# Altium PCB opo_v4_bak.PcbDoc
Units mil, origin at the board's own origin, x right, y up, seen from the top; angles counter-clockwise.
Board outline 1250 x 1250 mil, 6 copper layers (Top Layer, GND, Mid-Layer 3, Mid-Layer 4, VCC, Bottom Layer), stack 72.01 mil thick; 106 components, 83 nets, 445 pads, 216 vias.
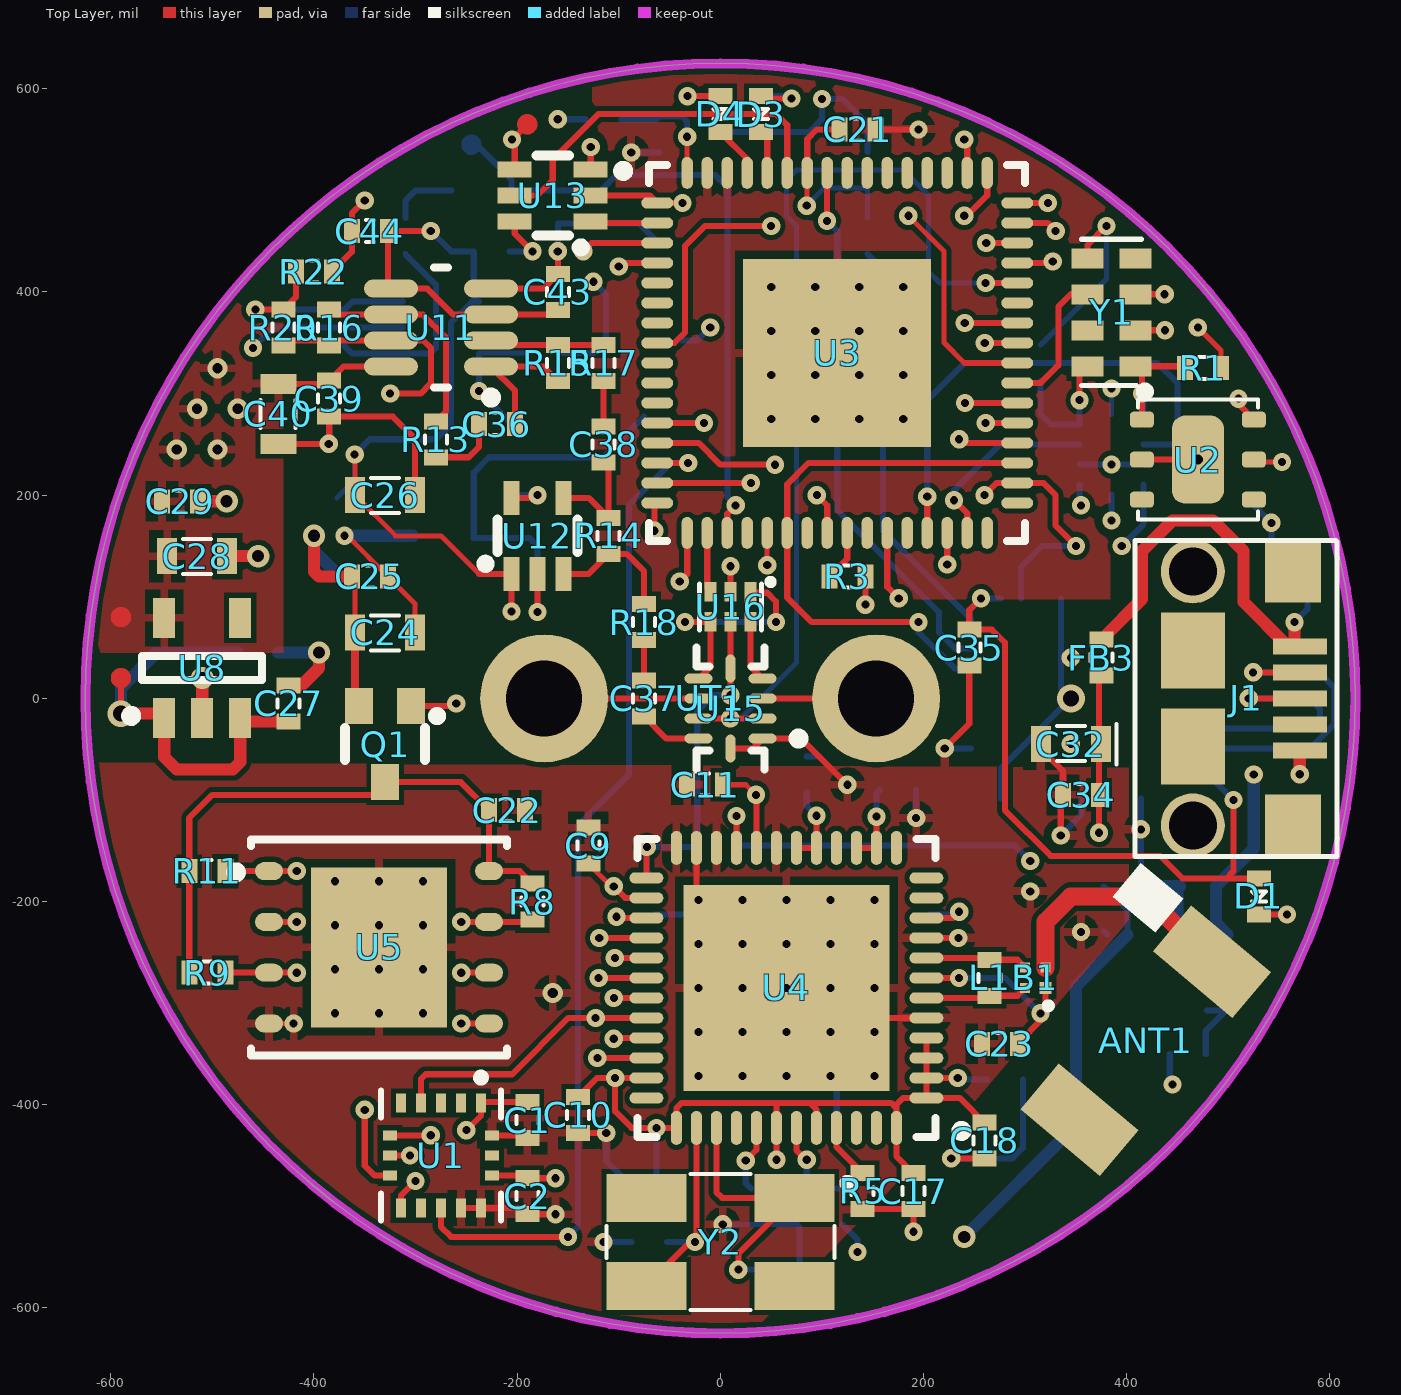
[diagram p0: Top Layer view]
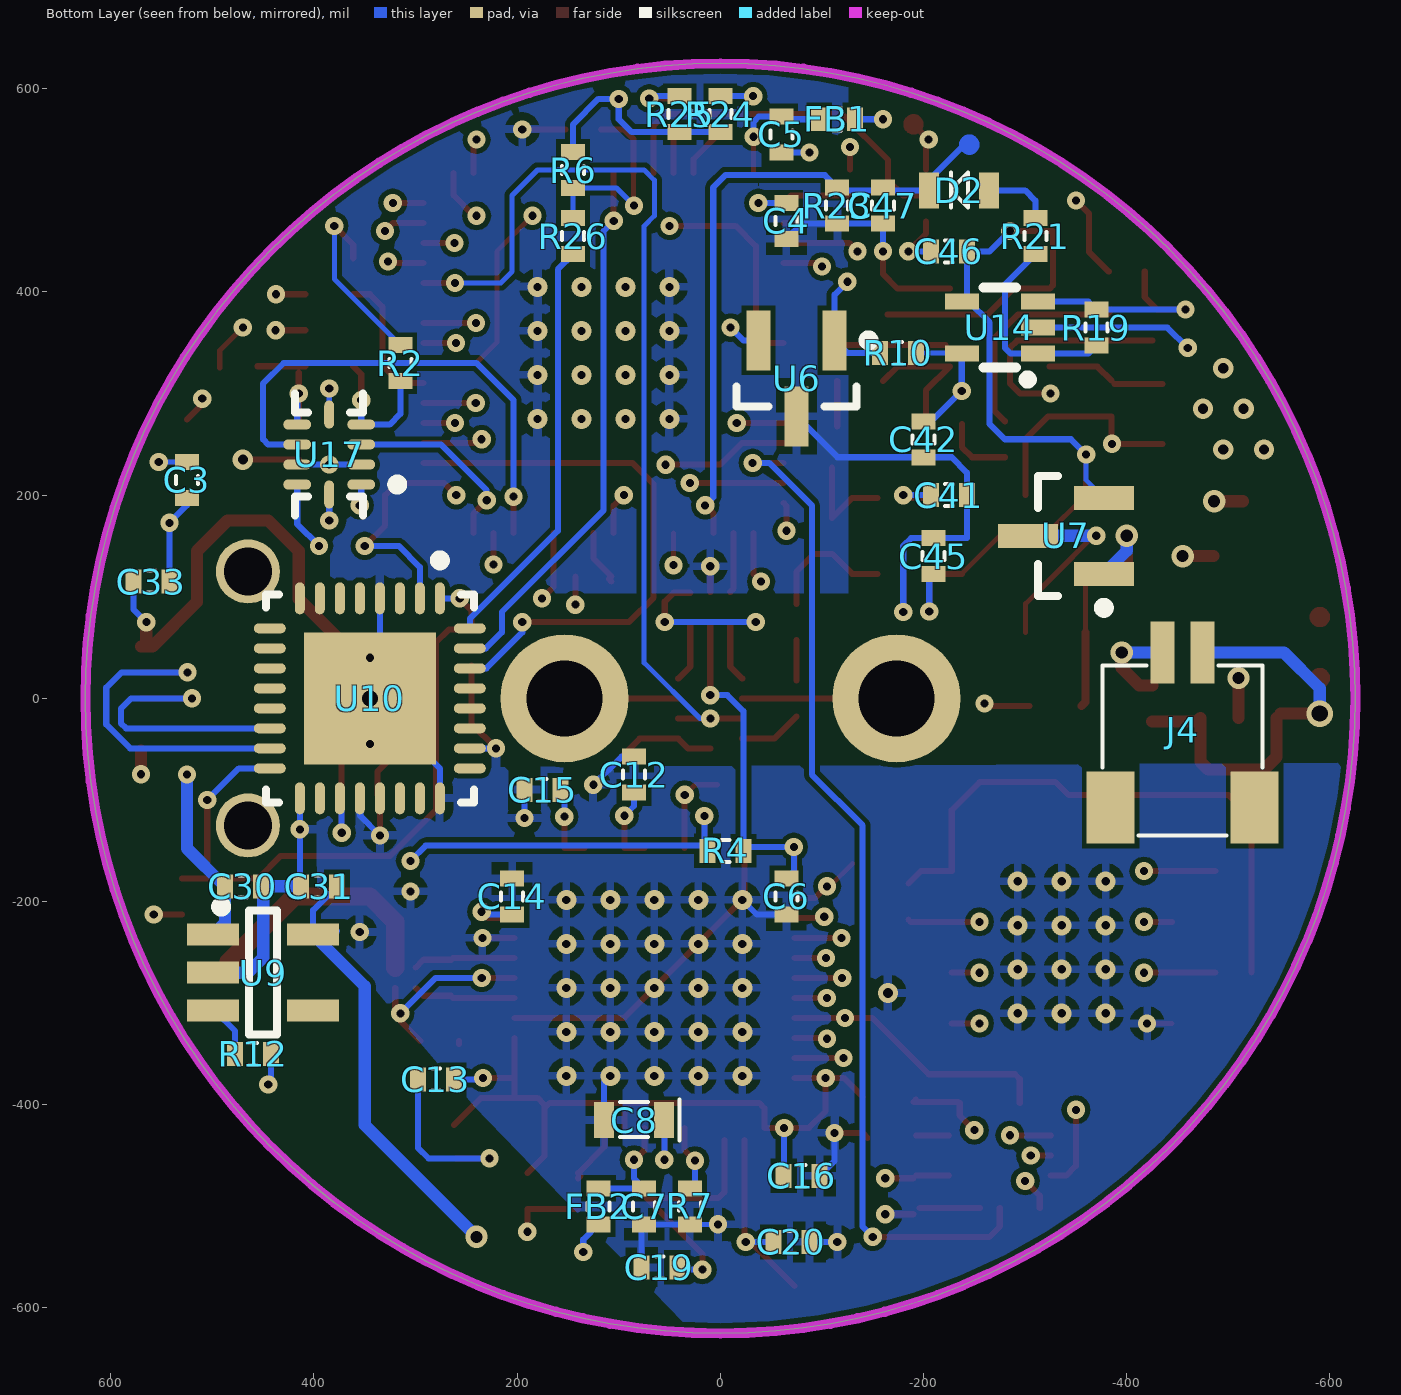
[diagram p1: Bottom Layer view, seen from below]
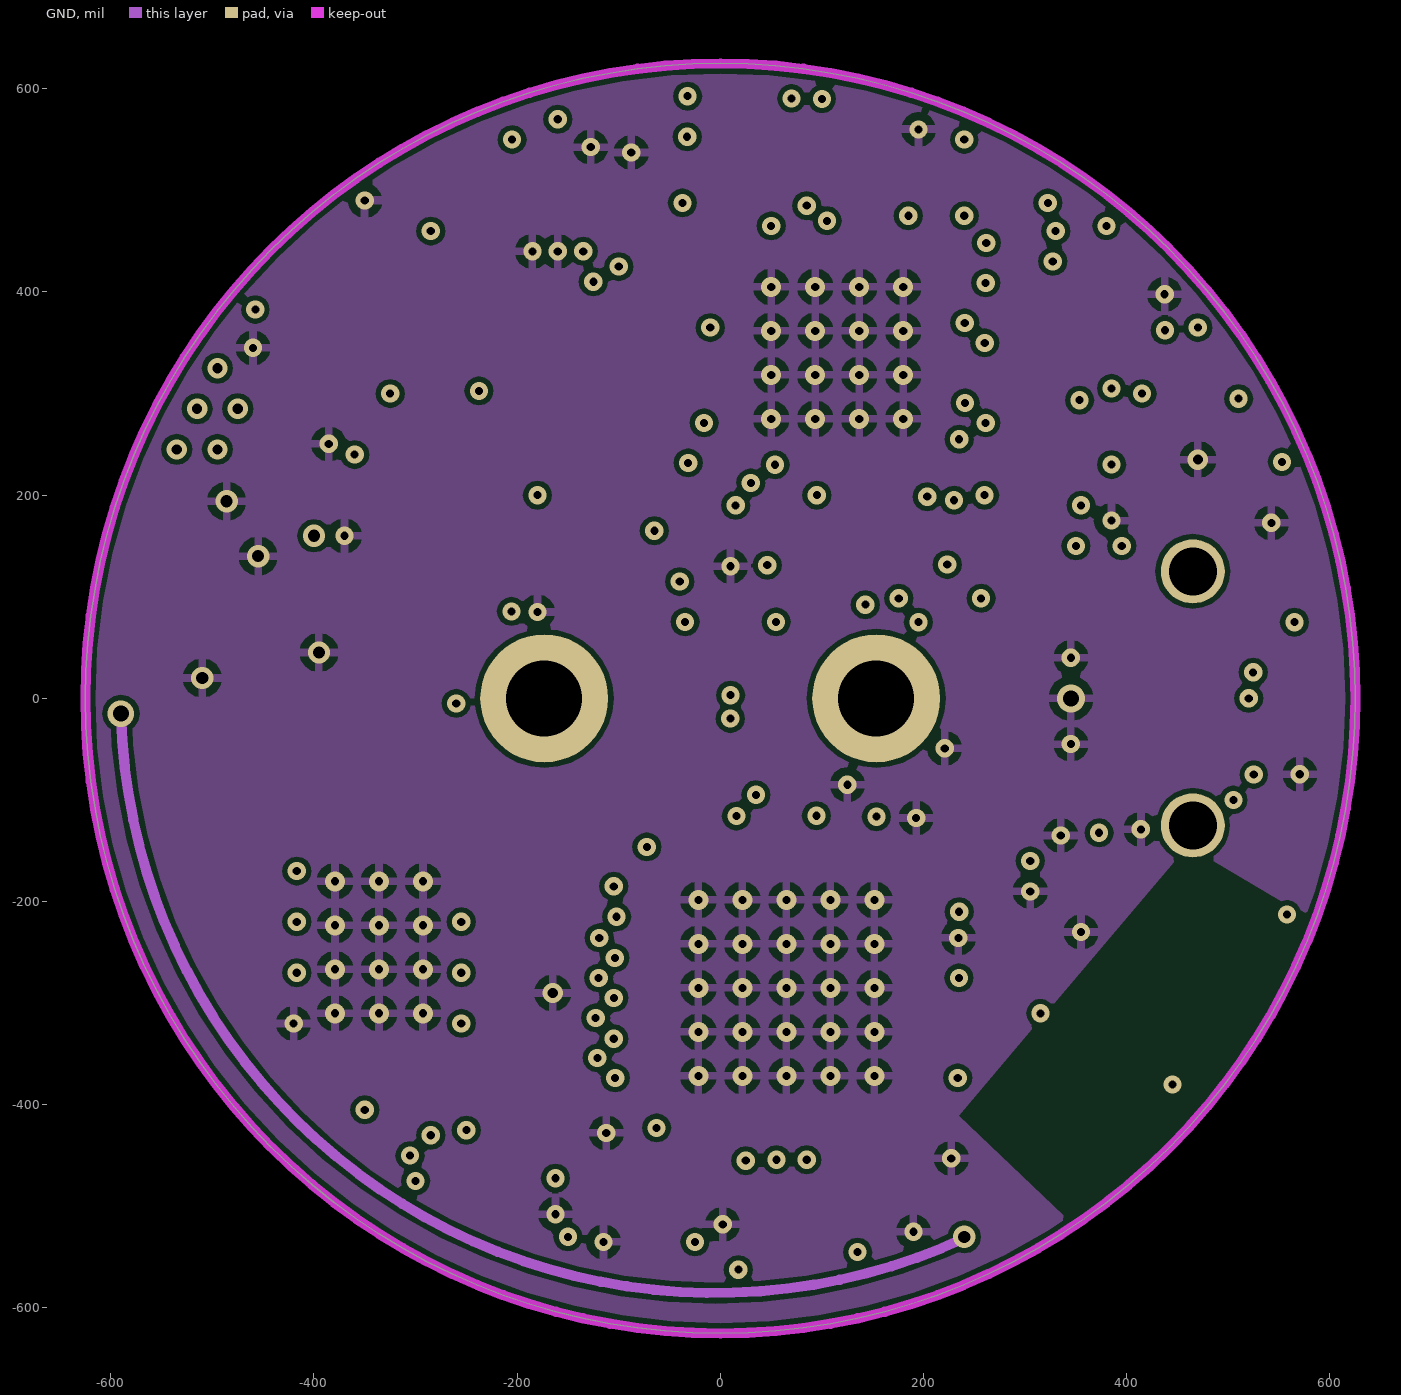
[diagram p2: GND]
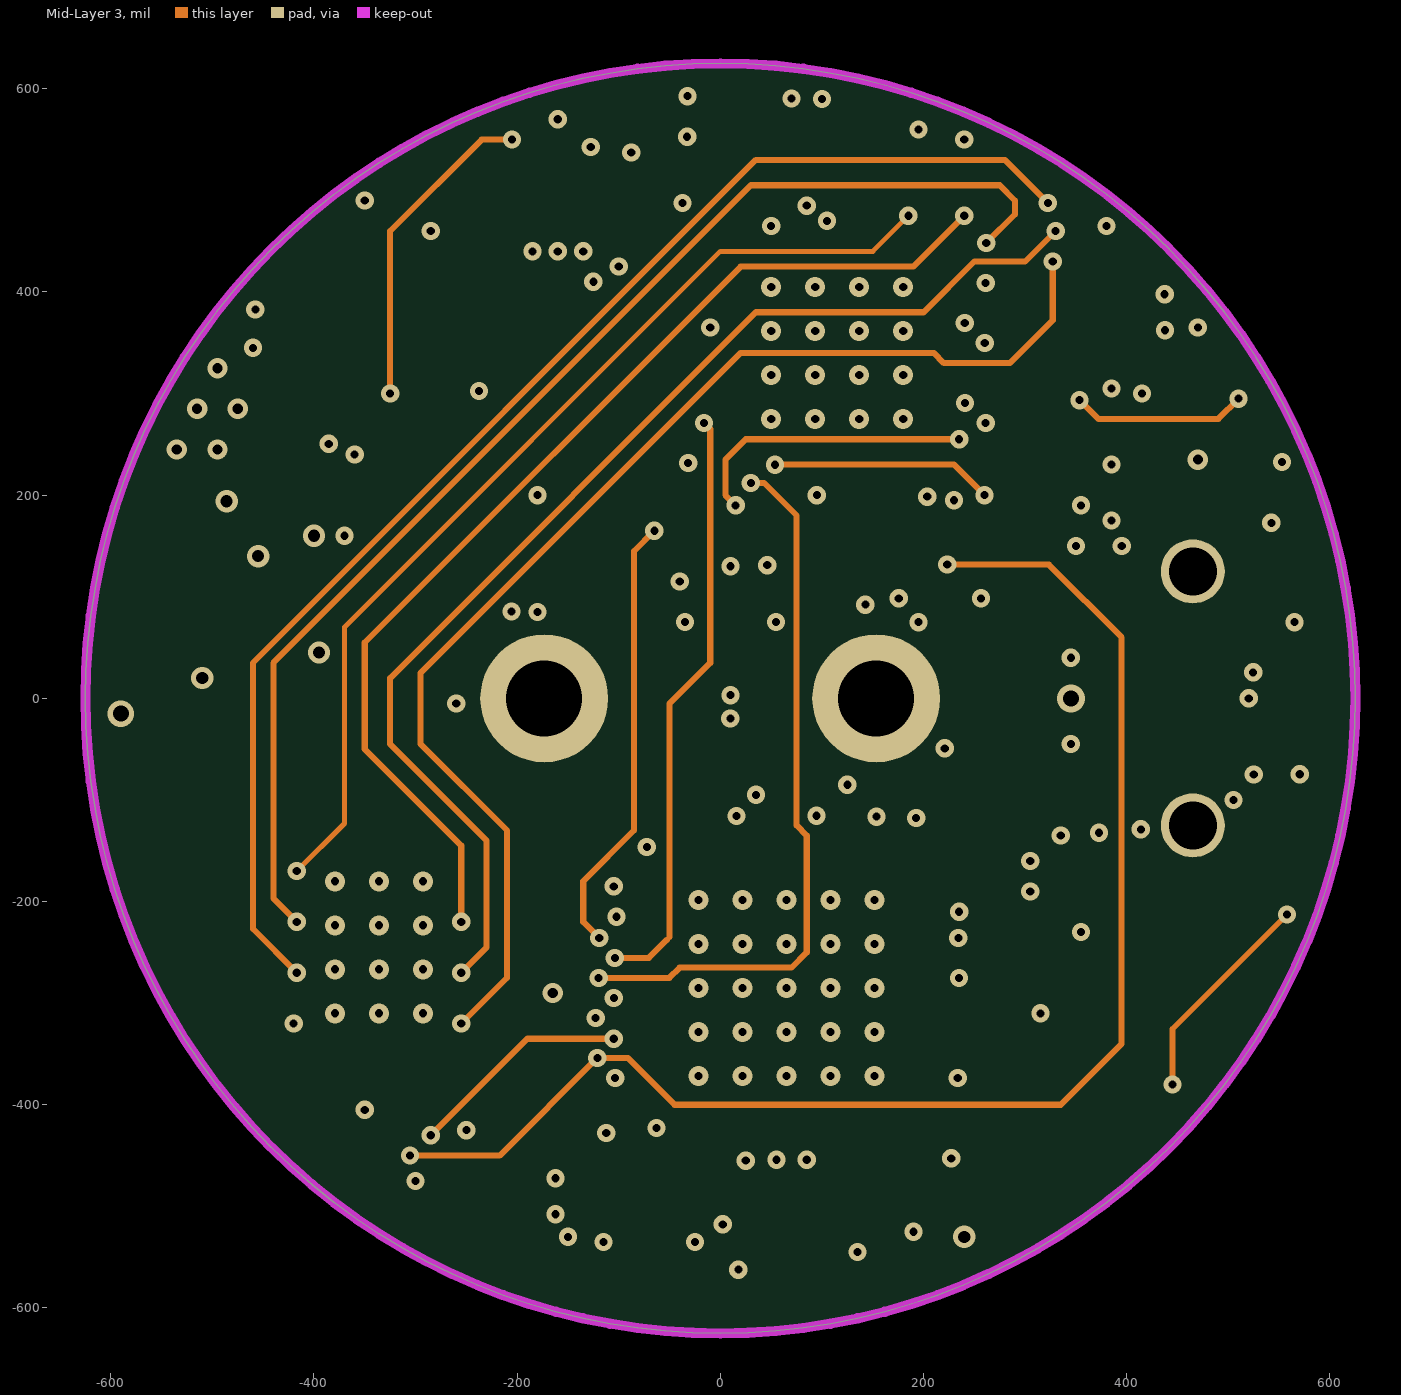
[diagram p3: Mid-Layer 3]
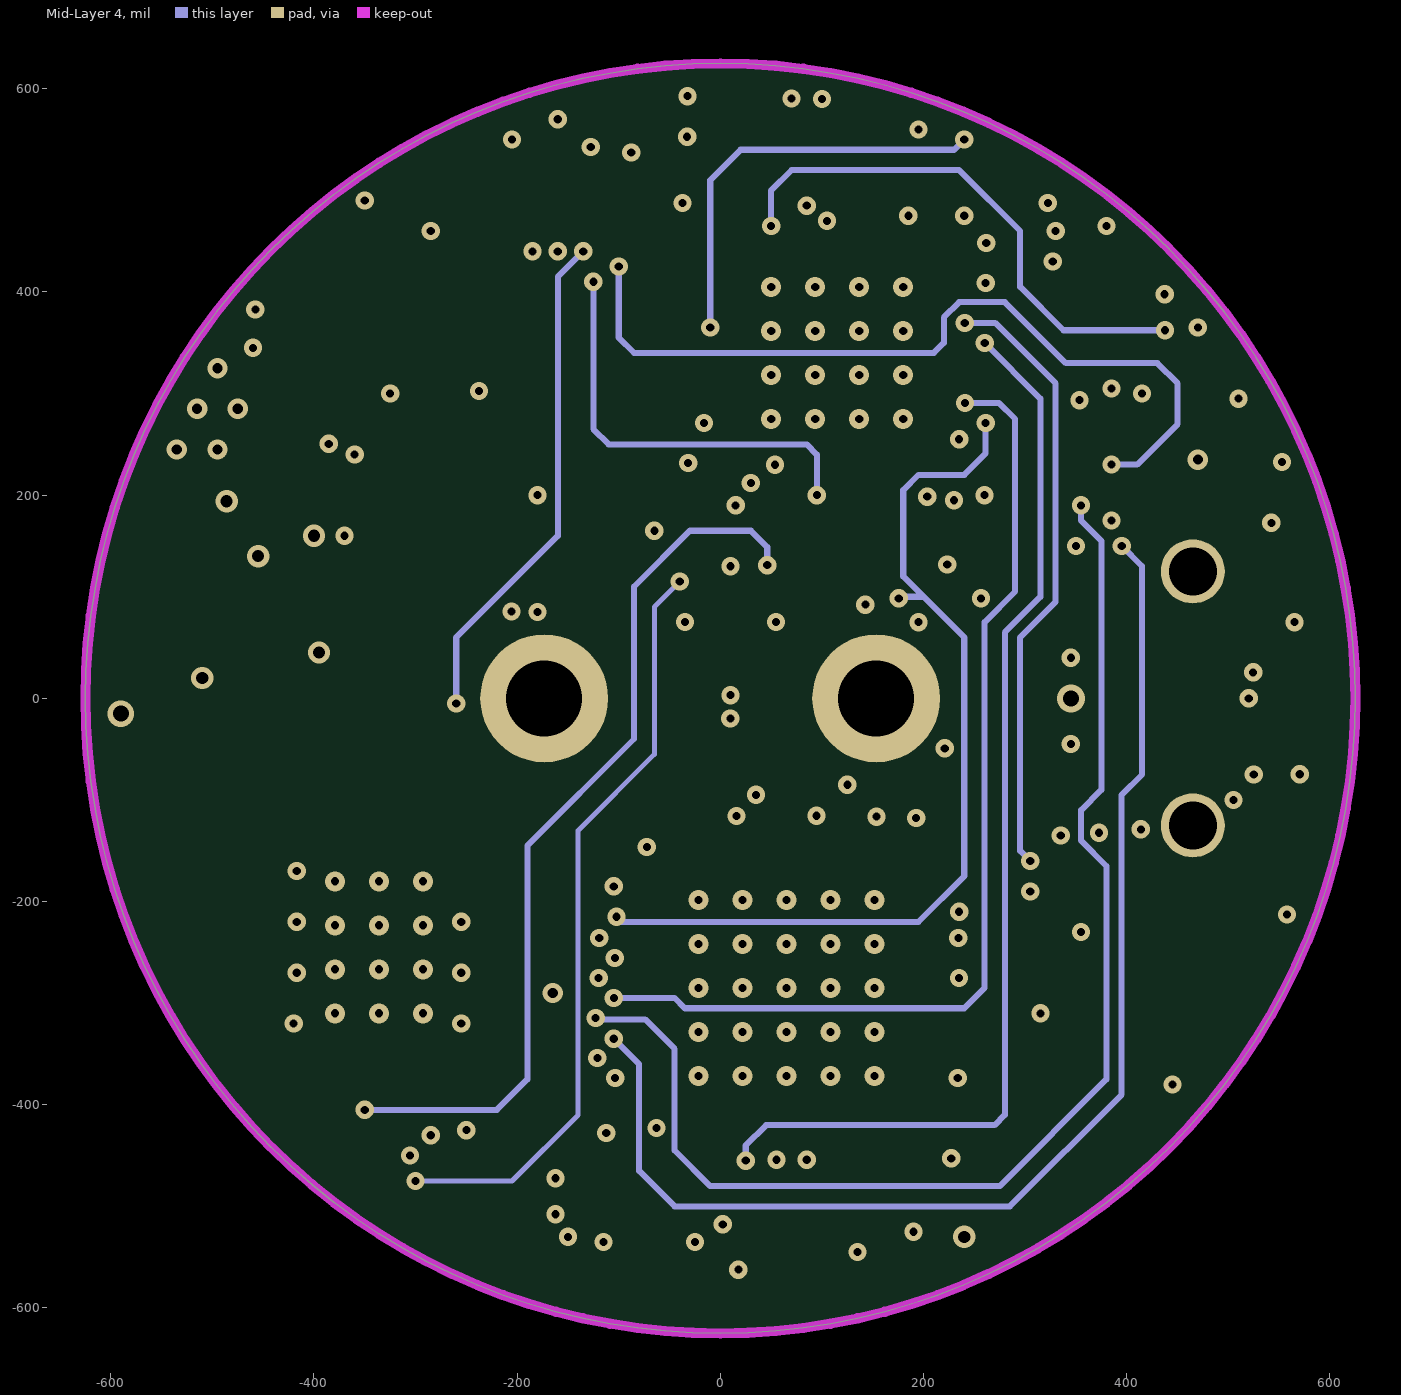
[diagram p4: Mid-Layer 4]
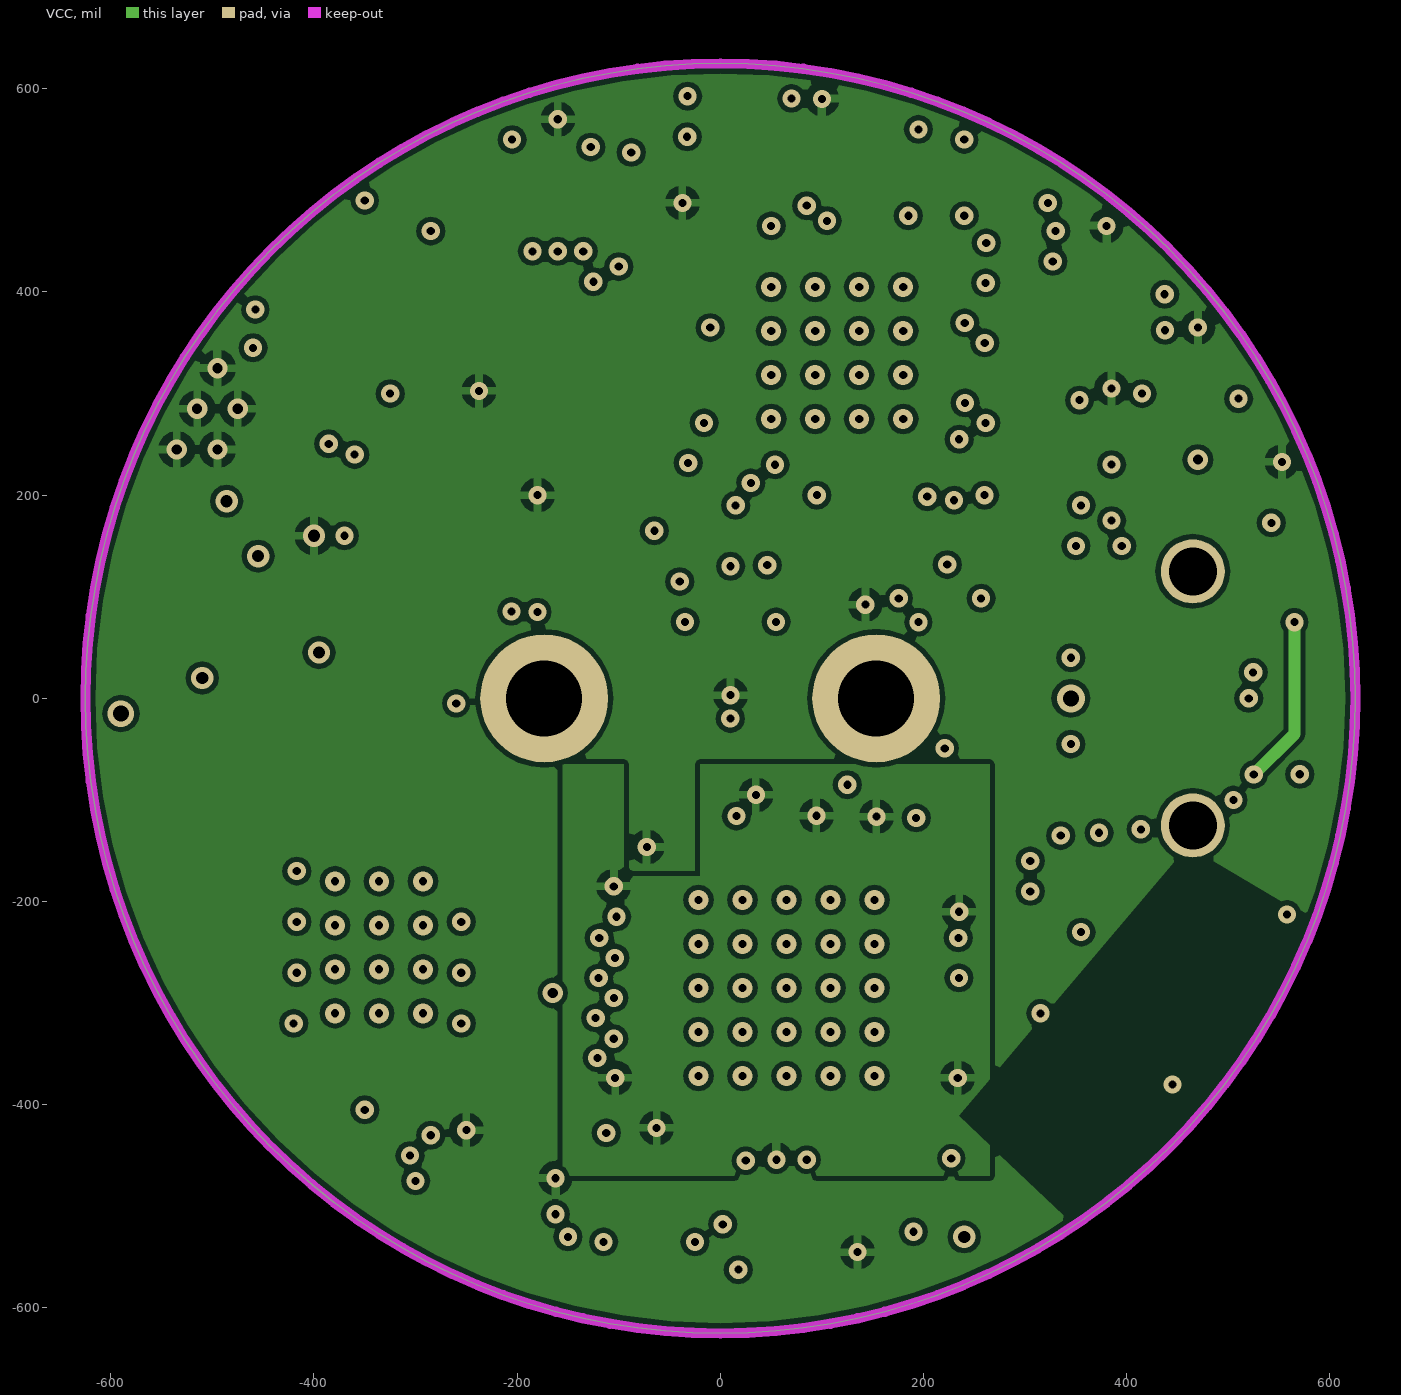
[diagram p5: VCC]

## Layer stack, top to bottom
Top Layer: signal copper 1.4
Dielectric: core 11.87, FR-4, Dk 4.8
GND: signal copper 1.4
Dielectric: prepreg 14, FR-4, Dk 4.8
Mid-Layer 3: signal copper 1.4
Dielectric: core 11.87, FR-4, Dk 4.8
Mid-Layer 4: signal copper 1.4
Dielectric: prepreg 14, FR-4, Dk 4.8
VCC: signal copper 1.4
Dielectric: core 11.87, FR-4, Dk 4.8
Bottom Layer: signal copper 1.4

## Board outline
-625,0 ccw(c0,0) 0,-625 ccw(c0,0) 625,0 ccw(c0,0) 0,625 ccw(c0,0)

## Design rules (kind name [scope] priority, off if disabled: settings)
Clearance "Clearance~Sunstone Circuits" [All] p1: gap=5 // Sunstone Circuits Minimum Clearance Rule (MLB~4&6 Layer Designs)
HoleSize "HoleSize~Sunstone Circuits" [All] p1: absolutevalues=TRUE maxlimit=251 minlimit=8 maxpercent=80.000 minpercent=20.000 // Sunstone Circuits Hole Size Rule (MLB~4&6 Layer Designs)
HoleSize Testpoint [All] p2: absolutevalues=TRUE maxlimit=100 minlimit=1 maxpercent=80.000 minpercent=20.000
HoleSize TestPointUsage [All] p3: absolutevalues=TRUE maxlimit=100 minlimit=1 maxpercent=80.000 minpercent=20.000
MinimumAnnularRing "MinimumAnnularRing~Sunstone Circuits" [All] p1: minimumring=5 // Sunstone Circuits Minimum Annular Ring (MLB~4&6 Layer Designs)
MinimumSolderMaskSliver [All] p1 off: minsoldermaskwidth=10
PlaneClearance "PlaneClearance~Sunstone Circuits" [All] p1: clearance=5 // Sunstone Circuits Power Plane Clearance Rule (MLB~4&6 Layer Designs)
PlaneConnect "PlaneConnect~Sunstone Circuits" [All] p1: planeconnectstyle=Relief reliefexpansion=12 reliefentries=4 reliefconductorwidth=8 reliefairgap=12 // Sunstone Circuits Power Plane Connect Rule (MLB~4&6 Layer Designs)
PolygonConnect "PolygonConnect~Sunstone Circuits" [All] p1: connectstyle=Relief reliefconductorwidth=8 reliefentries=4 polygonreliefangle="90 Angle" airgapwidth=8 // Sunstone Circuits Polygon Connect Style (MLB~4&6 Layer Designs)
RoomDefinition U_ultrasonic_tx [InComponentClass('U_ultrasonic_tx')] p1 off: confinementstyle=ConfineIn formatcopy=TRUE lockcomponents=FALSE outline -273.88,-265.4 -273.88,265.41 255.91,265.41 255.91,-265.4
RoomDefinition U_ultrasonic_rx [InComponentClass('U_ultrasonic_rx')] p2 off: confinementstyle=ConfineIn formatcopy=TRUE lockcomponents=FALSE outline -469.61,223.74 -469.61,336.26 -458.7,336.26 -458.7,407.48 -442.48,407.48 -442.48,448.7 -387.48,448.7 -387.48,488.7 -338.7,488.7 -338.7,497.48 -291.26,497.48 -291.26,534.61 -236.02,534.61 -236.02,551.26 -93.98,551.26 -93.98,527.48 -86.3,527.48 -86.3,202.48 -81.3,202.48 -81.3,117.48 -46.3,117.48 -46.3,-42.48 -103.7,-42.48 -103.7,88.98 -250.12,88.98 -250.12,171.3 -267.48,171.3 -267.48,212.52 -308.7,212.52 -308.7,223.74
RoomDefinition U_programming [InComponentClass('U_programming')] p3 off: confinementstyle=ConfineIn formatcopy=TRUE lockcomponents=FALSE outline 209.02,-135.98 209.02,155.67 395.41,155.67 395.41,171.42 619.23,171.42 619.23,-171.42 558.7,-171.42 558.7,-247.48 505.71,-247.48 505.71,-356.93 324.29,-356.93 324.29,-135.98
RoomDefinition U_power [InComponentClass('U_power')] p4 off: confinementstyle=ConfineIn formatcopy=TRUE lockcomponents=FALSE outline -609.81,-135.13 -609.81,125.13 -574.32,125.13 -574.32,222.7 -428.74,222.7 -428.74,240.87 -251.26,240.87 -251.26,69.29 -273.74,69.29 -273.74,30.39 -363.34,30.39 -363.34,-135.13
RoomDefinition U_impulse [InComponentClass('U_impulse')] p5 off: confinementstyle=ConfineIn formatcopy=TRUE lockcomponents=FALSE outline -547.48,-298.7 -547.48,-141.3 -496.57,-141.3 -496.57,-110.98 -386.26,-110.98 -386.26,26.02 -157.48,26.02 -157.48,608.7 -28.7,608.7 -28.7,617.48 68.7,617.48 68.7,588.7 177.48,588.7 177.48,552.76 327.76,552.76 327.76,410.87 438.74,410.87 438.74,313.7 477.48,313.7 477.48,-140.35 569.88,-140.35 569.88,-496.54 218.7,-496.54 218.7,-527.48 168.7,-527.48 168.7,-532.48 148.7,-532.48 148.7,-542.48 142.95,-542.48 142.95,-614.93 73.7,-614.93 73.7,-622.48 -73.7,-622.48 -73.7,-614.93 -125.2,-614.93 -125.2,-452.48 -168.7,-452.48 -168.7,-379.02 -496.57,-379.02 -496.57,-298.7
RoomDefinition U_accero_humid_rtc [InComponentClass('U_accero_humid_rtc')] p6 off: confinementstyle=ConfineIn formatcopy=TRUE lockcomponents=FALSE outline -347.06,-526.98 -347.06,-355.44 332.63,-355.44 332.63,464.35 437.37,464.35 437.37,306.02 514.93,306.02 514.93,267.48 558.7,267.48 558.7,182.52 514.93,182.52 514.93,149.13 514.93,-532.48 -161.3,-532.48 -218.7,-532.48 -218.7,-526.98
RoutingVias "RoutingVias~Sunstone Circuits" [All] p1: holewidth=8 width=30 viastyle="Through Hole" minholewidth=8 minwidth=18 maxholewidth=20 maxwidth=40 // Sunstone Circuits Routing Vias Rule (MLB~4&6 Layer Designs)
ShortCircuit "ShortCircuit~Sunstone Circuits" [All] p1: allowed=FALSE // Sunstone Circuits Short Circuit Rule~Do Not Allow (MLB~4&6 Layer Designs)
SilkToSolderMaskClearance [IsPad] p1 off: minsilkscreentomaskgap=10 clearancetoexposedcopper=TRUE
SolderMaskExpansion "Tent Vias" [isVia] p1: expansion=-10
SolderMaskExpansion "SolderMaskExpansion~Sunstone Circuits" [All] p2: expansion=3 // Sunstone Circuits Solder Mask Expansion Rule (MLB~4&6 Layer Designs)
ViasUnderSMD "ViasUnderSMD~Sunstone Circuits" [All] p1: allowed=FALSE // Sunstone Circuits Vias Under SMD~Do Not Allow (MLB~4&6 Layer Designs)
Width "Width~Sunstone Circuits" [All] p1: maxlimit=100 minlimit=5 preferedwidth=6 // Sunstone Circuits Minimum Width Rule (MLB~4&6 Layer Designs)
22 further rules are at their usual default settings.

## Classes and differential pairs
component class U_accero_humid_rtc: C1 C2 C3 R1 R2 U1 U2 Y1
component class U_impulse: ANT1 B1 C4 C5 C6 C7 C8 C9 C10 C11 C12 C13 C14 C15 C16 C17 C18 C19 C20 C21 C22 C23 D3 D4 FB1 FB2 L1 Q1 R3 R4 R5 R6 R7 R8 R9 R10 R11 R24 R25 R26 U3 U4 U5 U6 U17 Y2
component class U_power: C24 C25 C26 C27 C28 C29 J4 U7 U8
component class U_programming: C30 C31 C32 C33 C34 C35 D1 FB3 J1 R12 U9 U10
component class U_ultrasonic_rx: C36 C37 C38 C39 C40 C41 C42 C43 C44 C45 C46 C47 D2 R13 R14 R15 R16 R17 R18 R19 R20 R21 R22 R23 U11 U12 U13 U14
component class U_ultrasonic_tx: U15 U16 UT1

## Components (designator, comment, footprint, x,y, rotation, side; value= is the part's Value field where it differs from the comment)
ANT1 "Ground Antenna" "Chip Antenna" 435,-325 r230 top
B1 "BD2425N50200AHF" BD2425N50200AHF 310,-275 r90 top
C1 "Ceramic capacitor" 0402 -190,-415 r270 top
C2 "Ceramic capacitor" 0402 -190,-490 r270 top
C3 "Ceramic capacitor" 0402 525,215 r270 bottom
C4 "Ceramic capacitor" 0402 -65,470 r270 bottom
C5 "Ceramic capacitor" 0402 -60,555 r270 bottom
C6 "Ceramic capacitor" 0402 -65,-195 r270 bottom
C7 "Ceramic capacitor" 0402 75,-500 r270 bottom
C8 "Tantalum capacitor" "0603 - Polar Marking" 85,-415 r0 bottom
C9 "Ceramic capacitor" 0402 -130,-145 r90 top
C10 "Ceramic capacitor" 0402 -140,-410 r270 top
C11 "Ceramic capacitor" 0402 -15,-85 r180 top
C12 "Ceramic capacitor" 0402 85,-75 r90 bottom
C13 "Ceramic capacitor" 0402 280,-375 r0 bottom
C14 "Ceramic capacitor" 0402 205,-195 r90 bottom
C15 "Ceramic capacitor" 0402 175,-90 r0 bottom
C16 "Ceramic capacitor" 0402 -80,-470 r180 bottom
C17 "Ceramic capacitor" 0402 190,-485 r270 top
C18 "Ceramic capacitor" 0402 260,-435 r270 top
C19 "Ceramic capacitor" 0402 60,-560 r180 bottom
C20 "Ceramic capacitor" 0402 -70,-535 r0 bottom
C21 "Ceramic capacitor" 0402 135,560 r0 top
C22 "Ceramic capacitor" 0402 -210,-110 r0 top
C23 "Ceramic capacitor" 0402 275,-340 r180 top
C24 "Ceramic capacitor" 0603 -330,65 r0 top
C25 "Ceramic capacitor" 0402 -345,120 r0 top
C26 "Ceramic capacitor" 0603 -330,200 r0 top
C27 "Ceramic capacitor" 0402 -425,-5 r90 top
C28 "Ceramic capacitor" 0603 -515,140 r0 top
C29 "Ceramic capacitor" 0402 -531.84,194 r0 top
C30 "Ceramic capacitor" 0402 470,-185 r180 bottom
C31 "Ceramic capacitor" 0402 395,-185 r0 bottom
C32 "Tantalum capacitor" "0603 - Polar Marking" 345,-45 r180 top
C33 "Ceramic capacitor" 0402 560,115 r180 bottom
C34 "Ceramic capacitor" 0402 355,-95 r180 top
C35 "Ceramic capacitor" 0402 245,50 r270 top
C36 "Ceramic capacitor" 0402 -220,270 r180 top
C37 "Ceramic capacitor" 0402 -75,0 r90 top
C38 "Ceramic capacitor" 0402 -115,250 r90 top
C39 "Ceramic capacitor" 0402 -385,295 r270 top
C40 "Ceramic capacitor" 0603 -435,280 r270 top
C41 "Ceramic capacitor" 0402 -225,200 r180 bottom
C42 "Ceramic capacitor" 0402 -200,255 r270 bottom
C43 "Ceramic capacitor" 0402 -160,400 r90 top
C44 "Ceramic capacitor" 0402 -345,460 r180 top
C45 "Ceramic capacitor" 0402 -210,140 r90 bottom
C46 "Ceramic capacitor" 0402 -225,440 r0 bottom
C47 "Ceramic capacitor" 0402 -160,485 r270 bottom
D1 "LED, Orange" "0402 - DIODE" 530,-195 r270 top
D2 "Schottky diode" "0603 - DIODE" -235,500 r0 bottom
D3 "LED, Green" "0402 - DIODE" 40,575 r270 top
D4 "LED, Red" "0402 - DIODE" 0,575 r270 top
FB1 "Ferrite Bead" 0402 -115,570 r0 bottom
FB2 "Ferrite Bead" 0402 120,-500 r90 bottom
FB3 "Ferrite Bead" 0402 375,40 r90 top
J1 "micro USB-B" "Micro USB-B" 465,0 r270 top
J4 "SM02B-SRSS-TB" "JST SH series" -455,-135 r180 bottom
L1 "Chip inductor" 0402 265,-275 r270 top
Q1 "DMG1013UW" SC70-3 -330,-45 r180 top
R1 "Chip resistor" 0402 475,325 r180 top
R2 "Chip resistor" 0402 315,330 r270 bottom
R3 "Chip resistor" 0402 125,120 r180 top
R4 "Chip resistor" 0402 -5,-150 r180 bottom
R5 "Chip resistor" 0402 140,-485 r90 top
R6 "Chip resistor" 0402 145,520 r270 bottom
R7 "Chip resistor" 0402 30,-500 r270 bottom
R8 "Chip resistor" 0402 -185,-200 r90 top
R9 "Chip resistor" 0402 -505,-270 r180 top
R10 "Chip resistor" 0402 -175,340 r0 bottom
R11 "Chip resistor" 0402 -505,-170 r180 top
R12 "Chip resistor" 0402 460,-350 r0 bottom
R13 "Chip resistor" 0402 -280,255 r90 top
R14 "Chip resistor" 0402 -110,160 r90 top
R15 "Chip resistor" 0402 -160,330 r90 top
R16 "Chip resistor" 0402 -385,365 r90 top
R17 "Chip resistor" 0402 -115,330 r90 top
R18 "Chip resistor" 0402 -75,75 r90 top
R19 "Chip resistor" 0402 -370,365 r270 bottom
R20 "Chip resistor" 0402 -430,365 r90 top
R21 "Chip resistor" 0402 -310,455 r90 bottom
R22 "Chip resistor" 0402 -400,420 r0 top
R23 "Chip resistor" 0402 -115,485 r270 bottom
R24 "Chip resistor" 0402 0,575 r270 bottom
R25 "Chip resistor" 0402 40,575 r270 bottom
R26 "Chip resistor" 0402 145,455 r90 bottom
U1 "ADXL362" LGA_CC-16-4 -275,-450 r270 top
U2 "Humidity and Temperature Sensor IC" DFN6 470,235 r270 top
U3 "MSP430F1611" QFN50P900X900X90_HS-65N 115,340 r0 top
U4 "CC2420" QFN50P700X700X100_HS-49N 65,-285 r180 top
U5 "SST25VF064C" WSON -335,-245 r0 top
U6 "DS2411" SOT23-3N -75,315 r270 bottom
U7 "ISL60002" SOT23-3N -340,160 r0 bottom
U8 "ADP162" TSOT23-5 -510,30 r90 top
U9 "MAX1555" SOT23-5 450,-270 r180 bottom
U10 "FT232RQ" QFN-32 345,0 r270 bottom
U11 "MIC863" TSOP65P280X145-8N -275,365 r180 top
U12 "MIC861" SC70-5 -180,160 r0 top
U13 "ADG849" SC70-6 -165,495 r90 top
U14 "TS881" SC70-5 -275,365 r90 bottom
U15 "NX3L4684" QFN50P155X200X13-10N 10,-10 r180 top
U16 "NLX2G14" ULLGA6 10,90 r180 top
U17 "NX3L4684" QFN50P155X200X13-10N 385,240 r0 bottom
UT1 "400EP250" "TRANSDUCER RECEPTICLE" -10,0 r0 top
Y1 "RV-4162-C7" RV4162 385,380 r90 top
Y2 "TXC 7B" "TXC 7B" 0,-535 r180 top

## Footprints (in the part's own frame and the unit in brackets; to place one, negate y for a bottom-side part, rotate by r counter-clockwise, add the part's x,y. Pads: shape width x height; smd on the part's side, far side on the other; paste and mask are expansions set on the pad)
0402 [mm] "2-Leads, Body 1.00x0.50mm, IPC Medium Density"
  rect 0.4x0.6 smd: 1(-0.45,0) 2(0.45,0)
  silkscreen extent -0.1,-0.28 0.1,0.28, body extent -0.53,-0.28 0.53,0.27, height 0.4
"0402 - DIODE" [mm] "2-Leads, Body 1.00x0.50mm, IPC Medium Density"
  rect 0.4x0.6 smd: 1(-0.45,0) 2(0.45,0)
  silkscreen extent -0.13,-0.18 0.13,0.18, body extent -0.53,-0.28 0.53,0.27, height 0.4
0603 [mm] "2-Leads, Body 1.55x0.85mm, IPC Medium Density"
  rect 0.5x0.9 smd: 1(-0.75,0) 2(0.75,0)
  silkscreen extent -0.35,-0.45 0.35,0.43, body extent -0.75,-0.42 0.75,0.43, height 0.5
"0603 - DIODE" [mm] "2-Leads, Body 1.55x0.85mm, IPC Medium Density"
  rect 0.5x0.9 smd: 1(-0.75,0) 2(0.75,0)
  silkscreen extent -0.23,-0.45 0.2,0.43, body extent -0.75,-0.42 0.75,0.43, height 0.5
"0603 - Polar Marking" [mm] "2-Leads, Body 1.55x0.85mm, IPC Medium Density"
  rect 0.5x0.9 smd: 1(-0.75,0) 2(0.75,0)
  silkscreen extent -1.14,-0.51 0.35,0.51, body extent -0.75,-0.42 0.75,0.43, height 0.5
BD2425N50200AHF [mil] "BD2425N50200AHF"
  rect 11.81x11.81 smd: 1(-10,-10)
  rect 9.84x9.84 smd: 2(10,-10) 3(10,10) 4(-10,10)
  silkscreen extent -29,-14 -26,-11, body extent -20,-20 20,20, height 22
"Chip Antenna" [mm] "FR05-S1-N-0-102"
  rect 1.5x2.6 smd: 1(-2.075,-0.125) ""(3.075,-0.125)
  silkscreen extent -2.82,-3.07 -1.72,-1.67, body extent -3.03,-1.63 3.98,1.38, height 2
DFN6 [mm]
  rrect50% 0.4x0.6 smd: 1(-1,-1.4) 2(0,-1.4) 3(1,-1.4) 4(1,1.4) 5(0,1.4) 6(-1,1.4)
  rrect50% 2.2x1.3 smd mask+0.1: 7(0,0)
  silkscreen extent -1.8,-1.5 1.5,1.5, body extent -1.5,-1.5 1.5,1.5, height 1.1
"JST SH series" [mm] "JST SH series, 2 positions"
  rect 0.6x1.55 smd: 1(-0.5,4.575) 2(0.5,4.575)
  rect 1.2x1.8 smd: ""(-1.8,0.7) ""(1.8,0.7)
  silkscreen extent -2,0 2,4.25, body extent -2,0 2,4.25, height 2.95
LGA_CC-16-4 [mm]
  rect 0.475x0.25 smd: 1(-1.313,1) 2(-1.313,0.5) 3(-1.313,0) 4(-1.313,-0.5) 5(-1.313,-1) 9(1.313,-1) 10(1.313,-0.5) 11(1.313,0) 12(1.313,0.5) 13(1.313,1)
  rect 0.25x0.35 smd: 6(-0.5,-1.275) 7(0,-1.275) 8(0.5,-1.275) 14(0.5,1.275) 15(0,1.275) 16(-0.5,1.275)
  silkscreen extent -2.02,-1.5 1.63,1.5, body extent -1.63,-1.5 1.63,1.5, height 1.15
"Micro USB-B" [mm]
  rect 0.4x1.35 smd mask+0.1: 1(-1.3,2.675) 2(-0.65,2.675) 3(0,2.675) 4(0.65,2.675) 5(1.3,2.675)
  rect 1.6x1.4 smd mask+0.1: 6(-3.2,2.5) 6(3.2,2.5)
  round 1.6 hole 1.2: 6(-3.175,0) 6(3.175,0)
  rect 1.9x1.6 smd mask+0.1: 6(-1.2,0) 6(1.2,0)
  silkscreen extent -3.95,-1.45 3.95,3.6
QFN50P155X200X13-10N [mm] "QFN, 10-Leads, Body 2.1x1.6mm (max), Pitch 0.50mm, IPC Medium Density"
  oval 0.7x0.25 smd: 1(-0.8,0.75) 2(-0.8,0.25) 3(-0.8,-0.25) 4(-0.8,-0.75) 6(0.8,-0.75) 7(0.8,-0.25) 8(0.8,0.25) 9(0.8,0.75)
  oval 0.25x0.7 smd: 5(0,-1) 10(0,1)
  silkscreen extent -1.83,-1.53 0.85,1.53, body extent -0.83,-1.05 0.82,1.05, height 0.13
QFN50P700X700X100_HS-49N [mm] "QFN, 48-Leads, Body 7.00x7.00mm, Pitch 0.50mm, Thermal Pad 5.15x5.15mm, IPC Medium Density"
  oval 0.85x0.28 smd mask+0.07: 1(-3.5,2.75) 2(-3.5,2.25) 3(-3.5,1.75) 4(-3.5,1.25) 5(-3.5,0.75) 6(-3.5,0.25) 7(-3.5,-0.25) 8(-3.5,-0.75) 9(-3.5,-1.25) 10(-3.5,-1.75) 11(-3.5,-2.25) 12(-3.5,-2.75) 25(3.5,-2.75) 26(3.5,-2.25) 27(3.5,-1.75) 28(3.5,-1.25) 29(3.5,-0.75) 30(3.5,-0.25) 31(3.5,0.25) 32(3.5,0.75) 33(3.5,1.25) 34(3.5,1.75) 35(3.5,2.25) 36(3.5,2.75)
  oval 0.28x0.85 smd mask+0.07: 13(-2.75,-3.5) 14(-2.25,-3.5) 15(-1.75,-3.5) 16(-1.25,-3.5) 17(-0.75,-3.5) 18(-0.25,-3.5) 19(0.25,-3.5) 20(0.75,-3.5) 21(1.25,-3.5) 22(1.75,-3.5) 23(2.25,-3.5) 24(2.75,-3.5) 37(2.75,3.5) 38(2.25,3.5) 39(1.75,3.5) 40(1.25,3.5) 41(0.75,3.5) 42(0.25,3.5) 43(-0.25,3.5) 44(-0.75,3.5) 45(-1.25,3.5) 46(-1.75,3.5) 47(-2.25,3.5) 48(-2.75,3.5)
  rect 5.15x5.15 smd: 49(0,0)
  silkscreen extent -4.5,-3.72 3.72,3.73, body extent -3.58,-3.57 3.57,3.58, height 1
QFN50P900X900X90_HS-65N [mm] "QFN, 64-Leads, Body 9.00x9.00mm, Pitch 0.50mm, Thermal Pad 4.70x4.70mm, IPC Medium Density"
  oval 0.8x0.28 smd mask+0.07: 1(-4.5,3.75) 2(-4.5,3.25) 3(-4.5,2.75) 4(-4.5,2.25) 5(-4.5,1.75) 6(-4.5,1.25) 7(-4.5,0.75) 8(-4.5,0.25) 9(-4.5,-0.25) 10(-4.5,-0.75) 11(-4.5,-1.25) 12(-4.5,-1.75) 13(-4.5,-2.25) 14(-4.5,-2.75) 15(-4.5,-3.25) 16(-4.5,-3.75) 33(4.5,-3.75) 34(4.5,-3.25) 35(4.5,-2.75) 36(4.5,-2.25) 37(4.5,-1.75) 38(4.5,-1.25) 39(4.5,-0.75) 40(4.5,-0.25) 41(4.5,0.25) 42(4.5,0.75) 43(4.5,1.25) 44(4.5,1.75) 45(4.5,2.25) 46(4.5,2.75) 47(4.5,3.25) 48(4.5,3.75)
  oval 0.28x0.8 smd mask+0.07: 17(-3.75,-4.5) 18(-3.25,-4.5) 19(-2.75,-4.5) 20(-2.25,-4.5) 21(-1.75,-4.5) 22(-1.25,-4.5) 23(-0.75,-4.5) 24(-0.25,-4.5) 25(0.25,-4.5) 26(0.75,-4.5) 27(1.25,-4.5) 28(1.75,-4.5) 29(2.25,-4.5) 30(2.75,-4.5) 31(3.25,-4.5) 32(3.75,-4.5) 49(3.75,4.5) 50(3.25,4.5) 51(2.75,4.5) 52(2.25,4.5) 53(1.75,4.5) 54(1.25,4.5) 55(0.75,4.5) 56(0.25,4.5) 57(-0.25,4.5) 58(-0.75,4.5) 59(-1.25,4.5) 60(-1.75,4.5) 61(-2.25,4.5) 62(-2.75,4.5) 63(-3.25,4.5) 64(-3.75,4.5)
  rect 4.7x4.7 smd: 65(0,0)
  silkscreen extent -5.47,-4.7 4.7,4.7, body extent -4.55,-4.55 4.55,4.55, height 0.9
QFN-32 [mm] "32-Pin QFN 0.5 mm Pitch"
  oval 0.8x0.25 smd: 1(-2.5,1.75) 2(-2.5,1.25) 3(-2.5,0.75) 4(-2.5,0.25) 5(-2.5,-0.25) 6(-2.5,-0.75) 7(-2.5,-1.25) 8(-2.5,-1.75) 17(2.5,-1.75) 18(2.5,-1.25) 19(2.5,-0.75) 20(2.5,-0.25) 21(2.5,0.25) 22(2.5,0.75) 23(2.5,1.25) 24(2.5,1.75)
  oval 0.25x0.8 smd: 9(-1.75,-2.5) 10(-1.25,-2.5) 11(-0.75,-2.5) 12(-0.25,-2.5) 13(0.25,-2.5) 14(0.75,-2.5) 15(1.25,-2.5) 16(1.75,-2.5) 25(1.75,2.5) 26(1.25,2.5) 27(0.75,2.5) 28(0.25,2.5) 29(-0.25,2.5) 30(-0.75,2.5) 31(-1.25,2.5) 32(-1.75,2.5)
  rect 3.3x3.3 smd: 33(0,0)
  silkscreen extent -3.57,-2.6 2.6,2.6, body extent -2.58,-2.58 2.58,2.58, height 0.8
RV4162 [mm] "RTC"
  rect 0.5x0.8 smd: 1(-1.35,-0.6) 2(-0.45,-0.6) 3(0.45,-0.6) 4(1.35,-0.6) 5(1.35,0.6) 6(0.45,0.6) 7(-0.45,0.6) 8(-1.35,0.6)
  silkscreen extent -1.97,-0.91 1.83,0.75, body extent -1.6,-0.75 1.6,0.75, height 0.8
SC70-3 [mm]
  rect 0.7x0.9 smd: 1(-0.65,-0.95) 2(0.65,-0.95) 3(0,0.95)
  silkscreen extent -1.4,-0.8 1,0.4, body extent -0.9,-0.6 0.9,0.6, height 0.8
SC70-5 [mm]
  rect 0.4x0.85 smd: 1(-0.65,-0.95) 2(0,-0.95) 3(0.65,-0.95) 4(0.65,0.95) 5(-0.65,0.95)
  silkscreen extent -1.4,-0.8 1,0.4, body extent -0.9,-0.6 0.9,0.6, height 0.8
SC70-6 [mm]
  rect 0.4x0.85 smd: 1(-0.65,-0.95) 2(0,-0.95) 3(0.65,-0.95) 4(0.65,0.95) 5(0,0.95) 6(-0.65,0.95)
  silkscreen extent -1.4,-0.8 1,0.4, body extent -0.9,-0.6 0.9,0.6, height 0.8
SOT23-3N [mm] "SOT23, 3-Leads, Body 2.9x1.3mm, Pitch 0.95mm, Lead Span 2.5mm, IPC Medium Density"
  rect 1.5x0.6 smd: 1(-0.95,0.95) 2(-0.95,-0.95) 3(0.95,0)
  silkscreen extent -1.07,-1.5 0.7,1.92, body extent -0.7,-1.5 0.7,1.5, height 1.1
SOT23-5 [mm] "SOT23, 5-Leads, Body 2.9x1.6mm, Pitch 0.95mm, Lead Span 2.8mm, IPC High Density"
  rect 1.3x0.55 smd: 1(-1.25,0.95) 2(-1.25,0) 3(-1.25,-0.95) 4(1.25,-0.95) 5(1.25,0.95)
  silkscreen extent -1.18,-1.55 0.35,1.77, body extent -0.67,-1.5 0.65,1.5, height 1.45
"TRANSDUCER RECEPTICLE" [mm] "Transducer with Pin Recepticle"
  round 3.2 hole 1.9: 1(-4.15,0) 2(4.15,0)
  body extent -6.45,-6.49 6.5,6.49, height 14
TSOP65P280X145-8N [mm] "TSOP, 8-Leads, Body 2.90x1.60mm, Pitch 0.65mm, IPC Medium Density"
  oval 1.35x0.45 smd: 1(-1.25,0.975) 2(-1.25,0.325) 3(-1.25,-0.325) 4(-1.25,-0.975) 5(1.25,-0.975) 6(1.25,-0.325) 7(1.25,0.325) 8(1.25,0.975)
  silkscreen extent -1.38,-1.5 0.18,1.87, body extent -0.85,-1.5 0.85,1.5, height 1.45
TSOT23-5 [mm] "SOT23, 6-Leads, Body 3.0x2.9mm (max), Pitch 0.95mm, IPC Medium Density"
  rect 1x0.55 smd: 1(-1.25,0.95) 2(-1.25,0) 3(-1.25,-0.95) 4(1.25,-0.95) 5(1.25,0.95)
  silkscreen extent -1.32,-1.5 0.3,1.9, body extent -0.87,-1.5 0.87,1.5, height 1
"TXC 7B" [mm] "TXC 7B series"
  rect 2x1.2 smd: 1(-1.85,-1.1) 2(1.85,-1.1) 3(1.85,1.1) 4(-1.85,1.1)
  silkscreen extent -3.25,-1.7 2.85,1.7, body extent -2.5,-1.6 2.5,1.6, height 0.9
ULLGA6 [mm] "ULLGA6 1.45x1.0, 0.5P  CASE 613AF"
  rect 0.3x0.53 smd: 1(-0.5,-0.355)
  rect 0.3x0.49 smd: 2(0,-0.375) 3(0.5,-0.375) 4(0.5,0.375) 5(0,0.375) 6(-0.5,0.375)
  silkscreen extent -1.02,-0.65 0.77,0.58, body extent -0.72,-0.5 0.72,0.5, height 0.4
WSON [mm] "QFN, 8-Leads, Body 6.00x5.00mm, Pitch 1.27mm, Thermal Pad 3.40x4.00mm, IPC Medium Density"
  oval 0.7x0.45 smd: 1(-2.775,1.905) 2(-2.775,0.635) 3(-2.775,-0.635) 4(-2.775,-1.905) 5(2.725,-1.905) 6(2.725,-0.635) 7(2.725,0.635) 8(2.725,1.905)
  rect 3.4x4 smd: 9(-0.025,0)
  silkscreen extent -3.72,-2.7 3.17,2.7, body extent -3.08,-2.55 3.03,2.55, height 0.8

## Part data
ANT1: "2.4GHz Surface Mount Device (SMD) On Ground Antenna, 50 Ohms"
B1: "Ultra Low Profile 0404 Balun   50? to 200? Balanced"
C1 C2 C3 C4 C5 C6 C7 C9 C10 C11 C12 C13 C14 C15 C16 C17 C18 C21 C22 C25 C33 C34 C35 C39 C41 C42 C43 C44 C45 C46: library part C_0.1u_0402_ceramic, "Ceramic capacitor, 0.1u, 0402 package"
C8: library part C_10u_0603_tantalum, "Tantalum capacitor, 10 uF, 0603 package"
C19 C20: library part C_30p_0402_ceramic, "Ceramic capacitor, 30 pF, 0402 package"
C23: library part C_12p_0402_ceramic, "Ceramic capacitor, 12 pF, 0402 package"
C24 C26 C28 C40: library part C_10u_0603_ceramic, "Ceramic capacitor, 10 uF, 0603 package"
C27 C29 C30 C31 C37: library part C_1u_0402_ceramic, "Ceramic capacitor, 1 uF, 0402 package"
C32: library part C_4.7u_0603_tantalum, "Tantalum capacitor, 4.7 uF, 0603 package"
C36 C38: library part C_47p_0402_ceramic, "Ceramic capacitor, 47 pF, 0402 package"
C47: library part C_1000p_0402_ceramic, "Ceramic capacitor, 1000 pF, 0402 package"
D1: library part D_LED_ORANGE_0402, "LED, Orange, 0402"
D2: library part D_SCHOTTKY_30V_0.1A_0603, "Schottky diode 30 V 0.1 A 0603"
D3: library part D_LED_GREEN_0402, "LED, Green,  0402"
D4: library part D_LED_RED_0402, "LED, Red, 0402"
FB1 FB2 FB3: library part FB_150mA_0402, "Ferrite Bead, 150 mA, 0402 package"
J1: library part "Micro USB", "CONN USB MICRO B RECPT SMT R/A"
J4: "CONN HEADER SH 2POS SIDE 1MM TIN"
L1: library part L_6.8n_0402, "Chip inductor, 6.8 nH, 0402 package"
Q1: "P-CHANNEL ENHANCEMENT MODE MOSFET"
R1 R2: library part R_10K_0402, "Chip resistor, 10K, 0402 package"
R3 R4 R6 R8 R9 R11 R13 R17 R18: library part R_100K_0402, "Chip resistor, 100K, 0402 package"
R5: library part R_43K_0402, "Chip resistor, 43K, 0402 package"
R7 R14 R15 R16: library part R_1M_0402, "Chip resistor, 1M, 0402 package"
R10: library part R_2.2K_0402, "Chip resistor, 2.2K, 0402 package"
R12: library part R_1K_0402, "Chip resistor, 1K, 0402 package"
R19: library part R_1.24M_0402, "Chip resistor, 1.24M, 0402 package"
R20: library part R_37.4K_0402, "Chip resistor, 37.4K, 0402 package"
R21: library part R_27K_0402, "Chip resistor, 27K, 0402 package"
R22: library part R_422K_0402, "Chip resistor, 422K, 0402 package"
R23: library part R_270K_0402, "Chip resistor, 270K, 0402 package"
R24 R25: library part R_470_0402, "Chip resistor, 470, 0402 package"
R26: library part R_0_0402, "Chip resistor, 0, 0402 package"
U1: "Micropower, 3-Axis, ? g/? g/? g  Digital Output MEMS Accelerometer"
U2: library part SHT25, "SHT25"
U3: "MIXED SIGNAL MICROCONTROLLER"
U4: "2.4 GHz IEEE 802.15.4 / ZigBee-ready RF Transceiver"
U5: "64 Mbit SPI Serial Dual I/O Flash"
U6: "Silicon Serial Number with VCC Input"
U7: "IC VREF SERIES PREC SOT-23-3"
U8: "Ultralow Quiescent Current,  150 mA, CMOS Linear Regulators"
U9: "3 Dual-Input USB/AC Adapter 1-Cell Li+  Battery Chargers"
U10: library part IC_FT232RQ, "FT232R USB UART"
U11: "Dual Ultra Low Power Op Amp in SOT23-8"
U12: "IC OPAMP 400KHZ 2.7V ULT LP SC70"
U13: "0.5 ? SPDT/2:1 Mux in SC70"
U14: "Rail-to-rail 1.1 V nanopower comparator"
U15 U17: "IC ANALOG SWITCH SPDT 10XQFN"
U16: "Dual Schmitt-Trigger  Inverter"
UT1: library part Tranducer, "Air Ultrasounic Ceramic Transducers"
Y1: "Real Time Clock Module with I2C Bus"
Y2: "5 x 3.2 mm SMD SEAM CRYSTAL 7B SERIES"

## Via types
v1: diameter 18, hole 8, Top Layer to Bottom Layer, 148 vias
v2: diameter 19.68, hole 8.07, Top Layer to Bottom Layer, 53 vias
v3: diameter 20, hole 10, Top Layer to Bottom Layer, 7 vias
v4: diameter 22, hole 12, Top Layer to Bottom Layer, 6 vias
v5: diameter 26, hole 16, Top Layer to Bottom Layer, 1 vias
v6: diameter 27.56, hole 15.75, Top Layer to Bottom Layer, tented top, 1 vias

## Nets (pads, with @x,y where several pads share a name; then routed paths per layer and width w, separated by ;. In a path a pad name is that pad's centre, name@x,y a point inside that pad or via, vN(x,y) a via of type N, cw(c..) or ccw(c..) an arc to the next point about the centre after c; other vN are vias at no path point)
ADC0: U3.59 U13.5 | length 364.6
  Top Layer w6: U13.5 -180,495 -165,510 -165,530 -120,575 55,575 65.79,564.21 U3.59
AMP1_OUT: C38.1 R14.2 U12.4 | length 102.1
  Top Layer w6: U12.4 -129.69,197.4 R14.2 C38.1@-110,227.28
AMP2_OUT: C36.1 R15.1 U11.1 | length 138.1
  Top Layer w6: C36.1 -202.28,303.11 U11.1 -174.33,326.61 R15.1
AMP3_OUT: R16.1 R20.1 U11.7 U13.4 | length 622.6
  Top Layer w6: R20.1@-425.08,352.2 U11.7 -292.2,352.2 -285,345 -285,310 -295,300 v1(-325,300) ; U13.4 -202.4,547.4 v1(-205,550) -190,565
  Top Layer w10: -185,565 ccw(c-190,565) -185,565
  Mid-Layer 3 w6: v1(-325,300) -325,460 -235,550 v1(-205,550)
COMP_OUT: R19.2 R21.1 U14.1 | length 200.3
  Bottom Layer w6: R19.2 -362.13,339.41 U14.1 -285.59,339.41 -280,345 -280,407.28 R21.1
DS2411_EN: U3.50 U6.2 | length 478.4
  Top Layer w6: v1(240,550) 242.95,547.05 U3.50
  Mid-Layer 4 w6: v1(-10,365) -10,510 20,540 230,540 v1(240,550)
  Bottom Layer w6: U6.2 -22.6,352.4 v1(-10,365)
F\L\A\S\H\_\H\O\L\D\: R8.1 U3.49 U5.7 | length 1202.4
  Top Layer w6: v1(-255,-220) U5.7 -187.28,-220 R8.1 ; v1(240,475) 242.64,475 262.64,495 U3.49
  Mid-Layer 3 w6: v1(-255,-220) -255,-145 -350,-50 -350,55 20,425 190,425 v1(240,475)
F\L\A\S\H\_\W\P\: R9.1 U3.48 U5.3 | length 1428.4
  Top Layer w6: R9.1 U5.3 v1(-416.91,-270) ; U3.48 v1(322.36,487.64)
  Mid-Layer 3 w6: v1(-416.91,-270) -460,-226.91 -460,35 35,530 280,530 v1(322.36,487.64)
F\L\A\S\H\_C\S\: R11.1 U3.40 U5.1 | length 1272.3
  Top Layer w5: v1(185,475) 220,440 220,350.32 240.16,330.16
  Top Layer w6: R11.1 U5.1 v1(-416.91,-170) ; 240.16,330.16 U3.40
  Mid-Layer 3 w5: v1(-416.91,-170) -370,-123.09 -370,70 0,440 150,440 v1(185,475)
FLASH_PWR_GATE: Q1.1 U3.3 | length 618.5
  Top Layer w6: Q1.1 -262.6,-7.6 v1(-260,-5) ; v1(-135,440) -126.73,448.27 U3.3
  Mid-Layer 4 w6: v1(-260,-5) -260,60 -160,160 -160,415 v1(-135,440)
GND: C1.2 C2.2 C3.2 C4.2 C5.2 C6.2 C7.2 C8.2 C9.2 C10.2 C11.2 C12.2 C13.2 C14.2 C15.2 C16.2 C17.2 C18.2 C19.1 C20.1 C21.2 C22.2 C23.2 C24.2 C25.2 C26.2 C27.2 C28.2 C29.2 C30.2 C31.2 C32.2 C33.2 C34.2 C35.2 C39.2 C40.2 C41.2 C42.2 C43.2 C44.2 C45.2 C46.2 C47.2 J1.5 J4.1 R5.1 R7.2 R22.2 R23.2 U1.12 U1.13 U1.16 U2.2 U2.7 U3.62 U3.63 U3.65 U4.5 U4.9 U4.19 U4.22 U4.23 U4.24 U4.49 U5.4 U5.9 U6.3 U7.3 U8.2 U9.2 U10.4 U10.17 U10.20 U10.24 U10.26 U10.33 U11.4 U12.2 U13.3 U13.6 U14.2 U15.1 U15.10 U16.2 U17.10 Y1.3 | length 3914.1
  Top Layer w5: U5.4 v1(-420,-320) ; v1(-370,160) -367.28,160 C25.2 -300.47,93.19 C24.2
  Top Layer w6: C40.2 v1(-385.47,250.47) -385,250.94 C39.2 -322.28,277.28 -300.47,255.47 C26.2 ; R22.2 -362.72,439.57 C44.2 -362.72,477.28 v1(-350,490) ; U1.12 U1.13 C2.2@-196.04,-501.67 ; U11.4 -174.33,403.39 C43.2 v1(-160,440) ; U1.16 C1.2@-192.41,-430.31 ; U13.6 -202.4,457.4 v1(-185,440) ; C2.2 v1(-162.28,-507.72) ; v1(-180,85) U12.2 ; C10.2@-145,-432.72 C10.2 v1(-112.28,-427.72) ; U13.3 v1(-127.6,542.6) ; U4.23 -23.58,-196.42 v2(-21.61,-198.39) v2(21.69,-241.69) v2(65,-285) 94.53,-314.53 U4.5 ; U15.10 31.65,-49.37 U15.1 79.53,-39.53 v1(125,-85) ; U16.2 v1(10,130) ; R5.1 C17.2 v1(190,-525) ; C21.2 v1(195,560) ; U4.9 v1(234.21,-235.79) ; v1(220.79,-49.21) 245,-25 C35.2 ; v1(227.28,-452.72) C18.2 ; C23.2 C23.2@257.28,-337.28 ; C32.2@310.47,-45 337.28,-71.81 C34.2 ; v1(335,-135) C34.2@335,-97.28 ; Y1.3 v1(437.28,397.72) v1@440,395 ; U2.2 v3(470,235)
  Top Layer w12: C29.2 v4(-486,194) ; U8.2 v4(-510,20) ; C28.2 v4(-455,140) ; C27.2 -412.28,12.72 -395.12,29.88 v4(-395.12,45.12) ; v1(570.32,-74.68) J1.5
  Bottom Layer w5: v1(2.28,-517.72) R7.2 C7.2
  Bottom Layer w6: v4@-510.32,19.68 v4(-510,20) ; v1(-460,345) -440,365 U14.2 ; C46.2 v1(-185,440) ; v1(-180,85) -180,150 -187.72,157.72 C45.2 -242.72,157.72 C41.2 -242.72,222.28 -227.72,237.28 C42.2 -115.31,237.28 U6.3 ; v1(-160,440) C47.2 R23.2 -80,467.28 C4.2 ; v1(-115,-535) C20.1 ; v1(-112.28,-427.72) -112.28,-455.43 C16.2 ; v1(-87.72,537.28) C5.2 ; C6.2 -35.94,-212.72 v2(-21.61,-198.39) ; C7.2 77.72,-520.43 C19.1 ; C12.2 97.28,-57.28 v1(125,-85) ; v2(108.31,-371.61) 114.53,-377.83 C8.2 ; v1(192.72,-117.72) C15.2 ; v1(220.79,-49.21) U10.26 ; v1(227.28,-452.72) 287.28,-452.72 297.72,-442.28 C13.2 ; U10.24 276.1,-68.9 v6(345,0) ; v1(335,-135) 354.84,-115.16 U10.20 ; U10.33@335.16,9.84 U10.4 ; v1(385,175) U17.10 ; C31.2@413.9,-185 v1(413.9,-128.9) U10.17 ; C3.2 525,190 v1(542.28,172.72) C33.2
  Bottom Layer w12: J4.1 v4(-395.12,45.12) ; v1(-370,160) U7.3 ; C31.2 413.9,-185 C30.2 450,-187.28 450,-255 465,-270 U9.2
  other v1: 355,-230 305,-190 345,-45 345,40
  other v2: -21.61,-371.61 21.69,-371.61 65,-371.61 151.61,-371.61 -21.61,-328.31 21.69,-328.31 65,-328.31 108.31,-328.31 151.61,-328.31 -379.29,-309.96 -335.98,-309.96 -292.68,-309.96 -21.61,-285 21.69,-285 108.31,-285 151.61,-285 -379.29,-266.65 -335.98,-266.65 -292.68,-266.65 -21.61,-241.69 65,-241.69 108.31,-241.69 151.61,-241.69 -379.29,-223.35 -335.98,-223.35 -292.68,-223.35 21.69,-198.39 65,-198.39 108.31,-198.39 151.61,-198.39 -379.29,-180.04 -335.98,-180.04 -292.68,-180.04 50.04,275.04 93.35,275.04 136.65,275.04 179.96,275.04 50.04,318.35 93.35,318.35 136.65,318.35 179.96,318.35 50.04,361.65 93.35,361.65 136.65,361.65 179.96,361.65 50.04,404.96 93.35,404.96 136.65,404.96 179.96,404.96
  other v3: -165,-290
I2C/SPI: U3.4 U17.2 U17.8 | length 918.5
  Top Layer w6: v1(-100,425) -96.42,428.58 U3.4
  Mid-Layer 4 w6: v1(-100,425) -100,355 -85,340 210,340 220,350 220,375 235,390 280,390 340,330 430,330 450,310 450,270 410.16,230.16 v1(385,230.16)
  Bottom Layer w6: U17.2 v1(385,230.16) U17.8
INTEGRATOR: C47.1 D2.2 R23.1 U3.19 U3.36 | length 1007.4
  Top Layer w6: U3.19 6.73,181.73 v1(15,190) ; v1(235,255) 238.58,251.42 U3.36
  Mid-Layer 3 w6: v1(15,190) 5,200 5,235 25,255 v1(235,255)
  Bottom Layer w6: -240,545 -205.47,510.47 D2.2 -117.72,500 R23.1 -102.72,515 -5,515 7,503 7,198 v1(15,190)
  Bottom Layer w10: -240,545 ccw(c-245,545) -240,545
MISO0: U1.7 U3.30 U4.34 | length 1484.8
  Top Layer w6: U1.7 v1(-305.48,-450) ; v1(-121.1,-353.9) U4.34 ; v1(223.27,131.73) U3.30
  Mid-Layer 3 w6: v1(-305.48,-450) -217.2,-450 v1(-121.1,-353.9) -91.1,-353.9 -45,-400 335,-400 395,-340 395,60 323.27,131.73 v1(223.27,131.73)
MISO1: U3.46 U5.2 | length 1306.7
  Top Layer w6: U5.2 v1(-416.91,-220) ; v1(261.73,448.27) U3.46
  Mid-Layer 3 w6: v1(-416.91,-220) -440,-196.91 -440,35 30,505 275,505 290,490 290,476.54 v1(261.73,448.27)
MOSI0: U3.29 U17.7 | length 491.3
  Top Layer w6: U3.29 v1(203.58,198.58)
  Bottom Layer w6: v1(203.58,198.58) 203.58,293.58 240,330 430,330 450,310 450,254.84 445,249.84 U17.7
MOSI0_MUX: U1.6 U4.33 U17.9 | length 1593.6
  Top Layer w6: U1.6 -285.31,-430.31 v1(-285,-430) ; v1(-105,-335) -104.21,-334.21 U4.33
  Mid-Layer 3 w6: v1(-285,-430) -190,-335 v1(-105,-335)
  Mid-Layer 4 w6: v1(-105,-335) -80,-360 -80,-465 -45,-500 285,-500 395,-390 395,-95 415,-75 415,130 v1(395,150)
  Bottom Layer w6: v1(395,150) 416.5,171.5 U17.9
MOSI1: U3.45 U5.5 | length 1296.6
  Top Layer w6: v1(-255,-320) U5.5 ; U3.45 328.58,428.58 v1(327.17,430)
  Mid-Layer 3 w6: v1(-255,-320) -210,-275 -210,-130 -295,-45 -295,25 20,340 210,340 220,330 285,330 327.17,372.17 v1(327.17,430)
NetANT1_1: ANT1.1 B1.2 | length 253.8
  Top Layer w18.11: B1.2 320,-220 345,-195 419.49,-195 ANT1.1 ANT1.1@478,-265
NetC5_1: C5.1 FB1.2 U3.64 | length 118.3
  Top Layer w5: v1(-32.72,552.72) -32.64,552.64 U3.64
  Bottom Layer w6: FB1.2 -62.72,570 C5.1 -37.72,572.72 -32.72,567.72 v1(-32.72,552.72)
NetC19_2: C19.2 U4.39 Y2.1 | length 251.4
  Top Layer w6: U4.39@-3.9,-434.49 -3.9,-486.1 1.69,-491.69 Y2.1 17.72,-546.81 v1(17.72,-562.28)
  Bottom Layer w6: v1(17.72,-562.28) C19.2@45,-562.28
NetC20_2: C20.2 U4.38 Y2.3 | length 194.2
  Top Layer w6: Y2.3 -29.53,-535 v1(-25,-535) -23.58,-533.58 U4.38@-23.58,-434.49
  Bottom Layer w6: C20.2 v1(-25,-535)
NetC21_1: C21.1 R6.2 R26.2 U3.58 | length 198.2
  Top Layer w5: v1(85,485) 85.47,485.47 U3.58
  Top Layer w6: U3.58 85.47,550.47 95,560 C21.1
  Bottom Layer w5: v1(85,485) 102.28,502.28 R6.2 R26.2
NetC36_2: C36.2 R13.1 | length 69.1
  Top Layer w6: R13.1 -247.72,237.28 -237.72,247.28 C36.2
NetC37_2: C37.2 R18.1 | length 39.6
  Top Layer w6: C37.2 R18.1
NetC38_2: C38.2 R17.1 | length 44.6
  Top Layer w6: C38.2 R17.1
NetD1_2: D1.2 R12.1 | length 277.6
  Top Layer w6: D1.2 v1(557.72,-212.72)
  Mid-Layer 3 w6: v1(445,-380) 445,-325.43 v1(557.72,-212.72)
  Bottom Layer w6: R12.1 442.28,-377.72 440,-380 v1(445,-380)
NetD2_1: D2.1 R21.2 | length 66.9
  Bottom Layer w6: R21.2 -310,490 -300,500 D2.1
NetD3_1: D3.1 R25.1 | length 66.9
  Top Layer w6: D3.1 42.28,590.43 v1(70,590.43)
  Bottom Layer w6: R25.1 72.28,592.72 v1(70,590.43) v1@70,590
NetD3_2: D3.2 U3.60 | length 42.6
  Top Layer w6: D3.2 46.1,551.18 U3.60
NetD4_1: D4.1 R24.1 | length 64.6
  Top Layer w6: v1(-32.28,592.72) D4.1
  Bottom Layer w6: v1(-32.28,592.72) R24.1
NetD4_2: D4.2 U3.61 | length 51.1
  Top Layer w6: D4.2 26.42,530.87 U3.61
NetJ1_2: J1.2 U10.15 | length 339.1
  Top Layer w6: v1(524.41,25.59) J1.2
  Bottom Layer w6: U10.15 580.79,-49.21 604.41,-25.59 604.41,10.59 589.41,25.59 v1(524.41,25.59)
NetJ1_3: J1.3 U10.14 | length 287.6
  Top Layer w6: v1(520,0) J1.3
  Bottom Layer w6: U10.14 584.92,-29.53 590,-24.44 590,-10 580,0 v1(520,0)
NetR3_2: R3.2 U3.25 | length 53.6
  Top Layer w6: R3.2@107.28,115 R3.2@109.78,117.5 ; R3.2 124.84,137.56 U3.25
NetR5_2: R5.2 U4.45 | length 58.7
  Top Layer w6: U4.45 114.21,-441.5 R5.2 ; R5.2@137.5,-469.78 R5.2@140,-472.28
NetR12_2: R12.2 U9.3 | length 69.2
  Bottom Layer w6: R12.2 477.72,-327.28 497.6,-307.4 U9.3@479.21,-307.4
NetR13_2: R13.2 R16.2 U11.6 | length 212.9
  Top Layer w6: R16.2 -380.08,377.8 U11.6 -292.8,377.8 -270,355 -270,282.72 R13.2
NetR14_1: R14.1 R18.2 U12.3 | length 127
  Top Layer w6: U12.3 -129.69,122.6 R14.1 -92.28,142.28 -75,125 R18.2
NetR15_2: R15.2 R17.2 U11.2 | length 106.3
  Top Layer w6: U11.2@-221.3,347.72 R15.2 R17.2
NetR19_1: R19.1 R20.2 R22.1 U14.3 | length 218.7
  Top Layer w6: v1(-457.72,382.72) R20.2 -417.72,395 R22.1
  Bottom Layer w6: v1(-457.72,382.72) R19.1 -362.13,390.59 U14.3
NetU1_8: U1.8 U3.21 | length 994.8
  Top Layer w5: v1(46.1,131.1) U3.21
  Top Layer w6: v1(-350,-405) -350,-460 -340.31,-469.69 U1.8
  Mid-Layer 4 w6: v1(-350,-405) -220,-405 -190,-375 -190,-145 -85,-40 -85,110 -30,165 30,165 46.1,148.9 v1(46.1,131.1)
NetU1_9: U1.9 U3.17 | length 836.9
  Top Layer w6: U1.9 -314.38,-489.38 v1(-300,-475) ; v1(-40,115) -32.64,122.36 U3.17
  Mid-Layer 4 w5: v1(-300,-475) -205,-475 -140,-410 -140,-130 -65,-55 -65,90 v1(-40,115)
NetU1_11: U1.11 U3.14 | length 998.3
  Top Layer w6: U1.11 -275,-520 -265,-530 v1(-150,-530) ; U3.14 v1(-31.73,231.73)
  Bottom Layer w6: v1(-150,-530) -140,-520 -140,-125 -90,-75 -90,190 -48.27,231.73 v1(-31.73,231.73)
NetU3_2: U3.2 U13.1 | length 64
  Top Layer w6: U13.1@-126.14,467.95 U3.2
NetU3_8: U3.8 Y1.2 | length 767.3
  Top Layer w6: U3.8 -45.16,349.84 -35,360 -35,445 -15,465 v1(50,465) ; Y1.2 v1(437.72,362.28)
  Mid-Layer 4 w6: v1(50,465) 50,500 70,520 235,520 295,460 295,405 337.72,362.28 v1(437.72,362.28)
NetU3_18: U3.18 U16.3 | length 59.4
  Top Layer w6: U3.18 -12.95,108.03 U16.3
NetU3_39: U3.39 Y1.6 | length 139.2
  Top Layer w6: U3.39 315.47,310.47 332.72,327.72 332.72,385.43 345,397.72 Y1.6
NetU3_44: U3.44 U15.2 U15.8 | length 951.3
  Top Layer w6: U15.8 v1(9.84,-19.84) U15.2 ; v1(261.1,408.9) U3.44
  Bottom Layer w5: v1(9.84,-19.84) 20.16,-19.84 75,35 75,465 65,475 65,510 75,520 180,520 205,495 205,420 216.1,408.9 v1(261.1,408.9)
NetU15_3: U15.3 UT1.2 | length 112
  Top Layer w6: U15.3 153.23,-0.16 UT1.2
NetU15_7: U15.7 UT1.1 | length 151.7
  Top Layer w6: UT1.1@-173.23,-0.16 U15.7
ONEWIRE: R10.2 U3.24 U6.1 | length 569.6
  Top Layer w6: v1(95,200) 105.16,189.84 U3.24
  Mid-Layer 4 w6: v1(-125,410) -125,265 -110,250 85,250 95,240 v1(95,200)
  Bottom Layer w6: R10.2 -124.8,340 U6.1 -112.4,397.4 v1(-125,410)
OP1_NEGIN: C37.1 U15.9 | length 62.5
  Top Layer w6: C37.1 -53.19,-39.53 U15.9
R\A\D\I\O\_\C\S\: U3.38 U4.31 | length 1088.9
  Top Layer w6: v1(-104.84,-294.84) U4.31 ; v1(240.79,290.79) U3.38
  Mid-Layer 4 w6: v1(-104.84,-294.84) -45.16,-294.84 -35,-305 240,-305 260,-285 260,75 290,105 290,275 274.21,290.79 v1(240.79,290.79)
R\A\D\I\O\_\R\E\S\E\T\: R4.1 U3.42 U4.21 | length 1013.3
  Top Layer w6: U4.21 v1(15.79,-115.79) ; v1(240.47,369.53) U3.42
  Mid-Layer 4 w6: v1(240.47,369.53) 270.47,369.53 330,310 330,95 295,60 295,-150 v1(305,-160)
  Bottom Layer w6: v1(15.79,-115.79) 15.79,-146.93 17.72,-145 290,-145 v1(305,-160)
R\S\T\/NMI: R26.1 U10.32 | length 410.5
  Bottom Layer w6: R26.1 160,422.28 160,165 246.57,78.43 U10.32
RADIO_CCA: U3.16 U4.28 | length 511.3
  Top Layer w6: v1(-119.21,-235.79) U4.28 ; v1(-65,165) -65,189.53 U3.16
  Mid-Layer 3 w6: v1(-119.21,-235.79) -135,-220 -135,-180 -85,-130 -85,145 v1(-65,165)
RADIO_FIFO: U3.15 U4.30 | length 846.9
  Top Layer w6: v1(-119.84,-275.16) U4.30 ; U3.15 v1(30,212.05)
  Mid-Layer 3 w6: v1(-119.84,-275.16) -50.16,-275.16 -40,-265 70,-265 85,-250 85,-135 75,-125 75,180 42.95,212.05 v1(30,212.05)
RADIO_FIFOP: U3.12 U4.29 | length 665.4
  Top Layer w6: v1@-104.53,-255.47 v1(-103.89,-255.47) U4.29 ; U3.12 v1(-16.1,271.1)
  Mid-Layer 3 w5: -52.74,-237.74 -50,-235
  Mid-Layer 3 w6: v1(-103.89,-255.47) -70.47,-255.47 -52.74,-237.74 ; -50,-235 -50,-5 -10,35 -10,265 v1(-16.1,271.1)
RADIO_SFD: U3.27 U3.37 U4.27 | length 1048.9
  Top Layer w6: v1(-102.2,-215) -101.1,-216.1 U4.27 ; U3.27 164.21,109.8 v1(175.59,98.43) ; v1(261.1,271.1) U3.37
  Mid-Layer 4 w6: v1(-102.2,-215) -97.2,-220 195,-220 240,-175 240,60 200,100 ; v1(175.59,98.43) 177.17,100 200,100 ; v1(261.1,271.1) 261.1,241.1 240,220 195,220 180,205 180,120 200,100
RADIO_VREG_EN: R7.1 U3.41 U4.41 | length 1177.4
  Top Layer w6: v1(25,-455) 35.47,-444.53 U4.41 ; v1(260.16,349.84) U3.41
  Mid-Layer 4 w6: v1(25,-455) 25,-440 45,-420 270,-420 280,-410 280,65 315,100 315,295 v1(260.16,349.84)
  Bottom Layer w6: v1(25,-455) 25,-477.28 R7.1
RF_N: B1.3 L1.1 U4.8 | length 98.6
  Top Layer w6: U4.8 L1.1@263.19,-255.47 ; L1.1 292.28,-257.28 B1.3
RF_P: B1.4 L1.2 U4.6 | length 98.3
  Top Layer w6: U4.6 L1.2@262.87,-294.84 ; L1.2 292.28,-292.72 B1.4
SCL: R2.2 U2.6 U17.4 Y1.8 | length 335
  Top Layer w6: v1(353.5,293.5) 353.5,318.98 Y1.8 ; v1(510,295) 510,289.49 U2.6
  Mid-Layer 3 w6: v1(353.5,293.5) 372.01,275 490,275 v1(510,295)
  Bottom Layer w6: R2.2 315,280 325.47,269.53 U17.4 v1(353.5,293.5)
SCLK0: U3.31 U17.3 | length 189.6
  Top Layer w6: v1(230,195) 242.95,182.05 U3.31
  Bottom Layer w6: v1(230,195) 230,205 274.84,249.84 U17.3
SCLK0_MUX: U1.4 U4.32 U17.1 | length 1554.8
  Top Layer w6: U1.4 -294.69,-374.69 -290,-370 -205,-370 -149.53,-314.53 v1(-122.76,-314.53) U4.32
  Mid-Layer 4 w6: v1@-121.29,-316 -74,-316 -45,-345 -45,-445 -10,-480 275,-480 380,-375 380,-165 355,-140 355,-110 375,-90 375,155 355,175 v1(355,190)
  Bottom Layer w6: U17.1 353.5,191.5 v1(355,190)
SCLK1: U3.47 U5.6 | length 1245.4
  Top Layer w6: v1(-255,-270) U5.6 ; U3.47 322.05,467.95 v1(330,460)
  Mid-Layer 3 w6: v1(-255,-270) -230,-245 -230,-140 -325,-45 -325,20 35,380 200,380 250,430 300,430 v1(330,460)
SDA: R1.2 U2.1 U17.6 Y1.1 | length 124.1
  Top Layer w6: Y1.1 R1.2@455.43,326.85 ; U2.1 414.88,299.88 v1(415,300) Y1.1@415,320.47
  Bottom Layer w6: v1(415,300) 416.5,298.5 U17.6
TCK: U3.57 U10.31 | length 535.9
  Top Layer w6: v1(105,470) 105,517.01 U3.57
  Bottom Layer w6: v1(105,470) 115,460 115,185 215,85 215,65 230.79,49.21 U10.31
TX_1: U15.4 U16.6 | length 60.6
  Top Layer w6: U16.6 29.68,31.34 U15.4
TX_2: U15.6 U16.1 U16.4 | length 223.9
  Top Layer w6: v1(-34.76,75.24) U16.4 -9.68,31.34 U15.6 ; U16.1 46.02,103.98 54.76,95.24 v1(54.76,75.24)
  Bottom Layer w6: v1(-34.76,75.24) v1(54.76,75.24)
TXRX_SWITCH: B1.1 C23.1 U4.7 | length 189.3
  Top Layer w6: U4.7 v1(234.84,-275.16) ; C23.1@295,-337.28 315,-317.28 v1(315,-310) 320,-305 B1.1
  Bottom Layer w6: v1(234.84,-275.16) 280.16,-275.16 v1(315,-310)
UART1_RX: U3.22 U3.35 U10.30 | length 562.1
  Top Layer w6: v1(195,75) 90,75 65.79,99.21 U3.22 65.79,210.79 86.73,231.73 U3.35
  Bottom Layer w6: v1(195,75) 195,65 230.47,29.53 U10.30
UART1_TX: U3.13 U3.34 U10.2 | length 575.3
  Top Layer w6: U3.13 -21.42,251.42 0,230 v1(53.86,230) ; v1(260,200) 272.05,212.05 U3.34 317.95,212.05 330,200 330,170 v1(350,150)
  Mid-Layer 3 w6: v1(53.86,230) 230,230 v1(260,200)
  Bottom Layer w6: U10.2 295.79,129.21 316.57,150 v1(350,150)
VBAT: C27.1 C31.1 J4.2 U8.1 U8.3 U9.5 | length 2068.4
  Top Layer w6: v5(-590,-15) -590,15 -585,20
  Top Layer w10: -585,20 ccw(c-590,20) -585,20
  Top Layer w12: v5(-590,-15) U8.1@-551.61,-15 ; U8.1 -547.4,-57.6 -535,-70 -480,-70 -472.6,-62.6 U8.3 -469.09,-22.72 C27.1
  GND w10: v5(-590,-15) ccw(c-5,0) v4@242.15,-530.44
  GND w12: v5(-590,-15) v5@-584.95,-20.05
  Bottom Layer w6: U9.5@377.28,-229.09 U9.5@380.79,-232.6 ; C31.1 400.79,-208.5 U9.5
  Bottom Layer w12: v5(-590,-15) -590,10 -554.88,45.12 J4.2 ; v4(240,-530) 350,-420 350,-283.39 U9.5
VBUS: C30.1 C33.1 FB3.2 J1.1 U9.1 | length 760.3
  Top Layer w12: FB3.2 415,97.72 415,145 445,175 485,175 515,145 515,95 558.82,51.18 J1.1 ; J1.1@565,56.5 v1(565,75)
  VCC w12: v1(525,-75) 565,-35 v1(565,75)
  Bottom Layer w6: v1(565,75) 577.72,87.72 C33.1
  Bottom Layer w12: U9.1 487.72,-221.1 C30.1 525,-147.72 v1(525,-75)
VCC3.3: C1.1 C2.1 C3.1 C4.1 C6.1 C24.1 C25.1 C28.1 C29.1 C39.1 C40.1 C41.1 C42.1 FB1.1 FB2.1 Q1.2 R1.1 R2.1 R3.1 R4.2 R6.1 R10.1 R24.2 R25.2 U1.1 U1.14 U2.5 U3.1 U4.25 U7.1 U8.5 U11.8 U12.5 U13.2 U14.5 U15.5 U16.5 U17.5 Y1.5 | length 1816.5
  Top Layer w5: C25.1 -359.53,116.81 C24.1 ; v1(470,365) 492.72,342.28 R1.1 ; U2.5@527.4,232.72 v1(552.72,232.72)
  Top Layer w6: C40.1 C39.1@-388.19,309.53 ; C39.1 -371.1,326.61 U11.8 ; v1(-250,-425) -235.62,-410.62 U1.1 ; U1.1@-234.58,-397.28 C1.1 C1.1@-192.28,-395 ; U1.14 C2.1@-192.59,-469.69 ; U12.5 -182.6,197.4 v1(-180,200) ; C2.1 v1(-162.28,-472.28) ; U13.2 -69.53,495 U3.1 v1(-37.36,487.64) ; U4.25 -72.8,-146.69 v1(-72.35,-146.25) ; v1(10,3.16) U15.5 U16.5 ; v1(142.72,92.28) R3.1 ; Y1.5 361.38,446.38 v1(380,465)
  Top Layer w8: C24.1 -359.53,-3.66 Q1.2
  Top Layer w10: -585,80 ccw(c-590,80) -585,80
  Top Layer w12: v4(-400,160) -400,125 -395,120 C25.1
  Bottom Layer w5: U14.5 -237.01,340 R10.1 ; R2.1 380,412.72 v1(380,465) ; U17.5 v1(385,305) ; C3.1 v1(552.72,232.72)
  Bottom Layer w6: U14.5 v1(-237.6,302.6) -207.72,272.72 C42.1 ; C41.1 v1(-180,200) ; v1(-160,570) FB1.1 ; C6.1 -72.35,-169.93 v1(-72.35,-146.25) -26.46,-146.25 R4.2 -22.72,-12.72 -6.84,3.16 v1(10,3.16) ; C4.1 -64.92,487.64 v1(-37.36,487.64) ; R24.2 R25.2 87.28,557.28 100,570 v1(100,590) 120,590 145,565 R6.1 ; FB2.1 135,-532.72 v1(135,-545)
  Bottom Layer w12: v4(-400,160) -400,145.2 U7.1
  other v3: -535,245 -495,245 -515,285 -475,285 -495,325
VCC3.3_USB: C35.1 D1.1 U10.1 U10.16 | length 692.9
  Top Layer w6: v1(256.57,98.43) 245,86.85 C35.1 267.28,67.72 280,55 280,-110 325,-155 432.72,-155 455,-177.28 497.72,-177.28 ; v1(505,-100) 505,-170 497.72,-177.28 ; D1.1 497.72,-177.28
  Bottom Layer w6: v1(256.57,98.43) U10.1 ; U10.16 473.9,-68.9 v1(505,-100)
VCC_GATE: C22.1 Q1.3 R8.2 R9.2 R11.2 U5.8 | length 581.1
  Top Layer w6: R9.2 R11.2 -522.72,-117.72 -500,-95 -342.6,-95 Q1.3 -255.31,-82.4 C22.1 U5.8 -197.28,-170 R8.2
VDD1.8: C8.1 C9.1 C10.1 C11.1 C12.1 C13.1 C14.1 C15.1 C16.1 C17.1 C18.1 U4.1 U4.2 U4.3 U4.4 U4.10 U4.14 U4.15 U4.17 U4.18 U4.20 U4.26 U4.35 U4.37 U4.42 U4.44 U4.48 | length 1267.5
  Top Layer w5: C9.1 -107.72,-185 v1(-105,-185) ; C11.1 25,-85 v1(35,-95)
  Top Layer w6: C10.1 -121.3,-373.58 v1(-103.58,-373.58) ; v1(-105,-185) -93.58,-196.42 U4.26 U4.26@-71.38,-195 ; U4.35 v1(-103.58,-373.58) ; v1(35,-95) 35.47,-95.47 U4.20 ; v1@55.16,-454.84 v1(55.16,-454.07) U4.42 55.16,-399.84 56.94,-398.06 ; U4.18 U4.17 v1(94.53,-115.47) ; U4.44 94.53,-404.53 88.06,-398.06 ; U4.15 U4.14 v1(153.58,-116.42) ; C17.1 173.27,-450.55 U4.48 173.27,-403.27 ; U4.4 U4.3 U4.2 ; U4.10 228.9,-216.1 v1(235,-210) ; v1(233.58,-373.58) U4.2 ; C18.1@262.28,-420 235.55,-393.27 U4.1 ; v1(-103.58,-373.58) -103.58,-406.42 -87.2,-422.8 v1(-62.8,-422.8) U4.37 -43.27,-403.27 -38.06,-398.06 56.94,-398.06 ; 56.94,-398.06 88.06,-398.06 ; 88.06,-398.06 168.06,-398.06 173.27,-403.27 ; 173.27,-403.27 173.27,-399.8 179.8,-393.27 U4.1 ; U4.1 U4.2
  Bottom Layer w6: v1(-62.8,-422.8) -62.8,-469.49 C16.1 ; v1(55.16,-454.07) 55.16,-415.31 C8.1 ; C12.1 85,-105.94 v1(94.53,-115.47) ; v1(153.58,-116.42) 153.58,-93.7 C15.1 ; C14.1 232.28,-212.72 v1(235,-210) ; v1(233.58,-373.58) 235,-375 C13.1
VREF: C26.1 C43.1 C44.1 C45.1 C46.1 U7.2 U11.3 U11.5 U12.1 U14.4 | length 967.5
  Top Layer w5: v1(-360,240) -359.53,239.53 C26.1 -319.53,160 -275,160 -237.6,122.6
  Top Layer w6: v1(-285,460) C44.1 -327.28,406.46 U11.5 -288.39,403.39 -262.8,377.8 U11.3 C43.1@-164.49,377.8 ; -237.6,122.6 U12.1 v1(-205.59,85.59)
  Bottom Layer w5: U7.2 -360,214.8 v1(-360,240)
  Bottom Layer w6: v1(-360,240) -345,255 -280,255 -265,270 -265,370 -244.41,390.59 U14.4 -242.72,395.71 C46.1 -265,440 v1(-285,460) ; C45.1 -205.59,117.87 v1(-205.59,85.59)
VREG_IN: C7.1 FB2.2 U4.43 | length 114.7
  Top Layer w6: U4.43 74.84,-444.84 85,-455 v1(85,-454.07)
  Bottom Layer w6: v1(85,-454.07) 85,-472.28 C7.1 FB2.2
VUSB: C32.1 C34.1 FB3.1 U10.19 | length 184.3
  Top Layer w6: v1(372.72,-132.28) C34.1 FB3.1@372.72,20
  Bottom Layer w6: v1(372.72,-132.28) U10.19@372.72,-100.24
pads on no net: ANT1. J1.4 J1.6 J4. U1.2 U1.3 U1.5 U1.10 U1.15 U2.3 U2.4 U3.5 U3.6 U3.7 U3.9 U3.10 U3.11 U3.20 U3.23 U3.26 U3.28 U3.32 U3.33 U3.43 U3.51 U3.52 U3.53 U3.54 U3.55 U3.56 U4.11 U4.12 U4.13 U4.16 U4.36 U4.40 U4.46 U4.47 U8.4 U9.4 U10.3 U10.5 U10.6 U10.7 U10.8 U10.9 U10.10 U10.11 U10.12 U10.13 U10.18 U10.21 U10.22 U10.23 U10.25 U10.27 U10.28 U10.29 Y1.4 Y1.7 Y2.2 Y2.4

## Polygon pours and split planes (outlines as drawn)
VDD1.8 on VCC "Bottom Layer-No Net" (solid, pour order 9): -155,-65 -155,-470 265,-470 265,-65 -20,-65 -20,-175 -95,-175 -95,-65
VCC3.3 on VCC "Bottom Layer-No Net" (solid, pour order 10): -630.33,-2.23 ccw(c-5.33,-2.23) -5.33,-627.23 ccw(c-5.33,-2.23) 619.67,-2.23 ccw(c-5.33,-2.23) -5.33,622.77 ccw(c-5.33,-2.23)
GND on Top Layer "Bottom Layer-No Net" (solid, pour order 12): -618.21,-63.08 -608.02,-133.2 -578.21,-233.08 -543.21,-303.08 -498.21,-373.08 -443.21,-438.08 -378.21,-493.08 -313.21,-538.08 -248.21,-573.08 -188.21,-593.08 -128.21,-608.08 -68.21,-618.08 -33.21,-623.08 1.79,-623.08 31.88,-623.17 246.88,-400.89 401.88,-218.17 401.88,-68.17
GND on Top Layer "Bottom Layer-No Net" (solid, pour order 14): -126.22,612.65 -126.22,97.65 383.78,97.65 383.78,487.65 333.78,522.65 293.78,547.65 243.78,572.65 188.78,592.65 133.78,607.65 78.78,617.65 -6.22,622.65
VCC3.3 on Top Layer "Bottom Layer-No Net" (solid, pour order 16): -430.45,45 -610,45 -612.88,53.74 -610.36,74.97 -607.85,96.2 -598.43,143.56 -591.87,166.8 -585.32,190.04 -576.96,212.69 -568.61,235.34 -558.5,257.27 -548.39,279.19 -536.59,300.26 -524.8,321.32 -511.38,341.4 -497.97,361.47 -484.76,378.24 -471.54,395 -430.45,395
GND on Bottom Layer "Bottom Layer-No Net" (solid, remove dead copper, pour order 11): -622.81,-63.53 -612.62,-133.65 -582.81,-233.53 -547.81,-303.53 -502.81,-373.53 -447.81,-438.53 -382.81,-493.53 -317.81,-538.53 -252.81,-573.53 -192.81,-593.53 -132.81,-608.53 -72.81,-618.53 -37.81,-623.53 -2.81,-623.53 27.29,-623.62 242.29,-401.34 397.29,-218.62 397.29,-68.62
GND on Bottom Layer "Bottom Layer-No Net" (solid, pour order 13): -126.11,618.23 -126.11,103.23 383.89,103.23 383.89,493.23 333.89,528.23 293.89,553.23 243.89,578.23 188.89,598.23 133.89,613.23 78.89,623.23 -6.11,628.23
GND on GND "GND-No Net" (solid, pour order 15): -627.37,0.61 ccw(c-2.37,0.61) -2.37,-624.39 ccw(c-2.37,0.61) 622.63,0.61 ccw(c-2.37,0.61) -2.37,625.61 ccw(c-2.37,0.61)

## Keep-outs
Keep-Out Layer:
  circle w10: c0,0 r625

## Other copper
GND:
  pour cut-out: 234.45,-411 370,-540 620,-240 460,-145
VCC:
  pour cut-out: 234.45,-411 370,-540 620,-240 460,-145